# Altium PCB ETL_RB.PcbDoc (part 1 of 3)
Units mm, origin at the board's own origin, x right, y up, seen from the top; angles counter-clockwise.
Board outline 130.3 x 56.5 mm, 8 copper layers (Top Layer, plane 1, M1, plane 2, plane 3, M2, plane 4, Bottom Layer), stack 0.937 mm thick; 226 components, 231 nets, 2035 pads, 85 vias.
Unrouted connection lines stored in the file: 487.
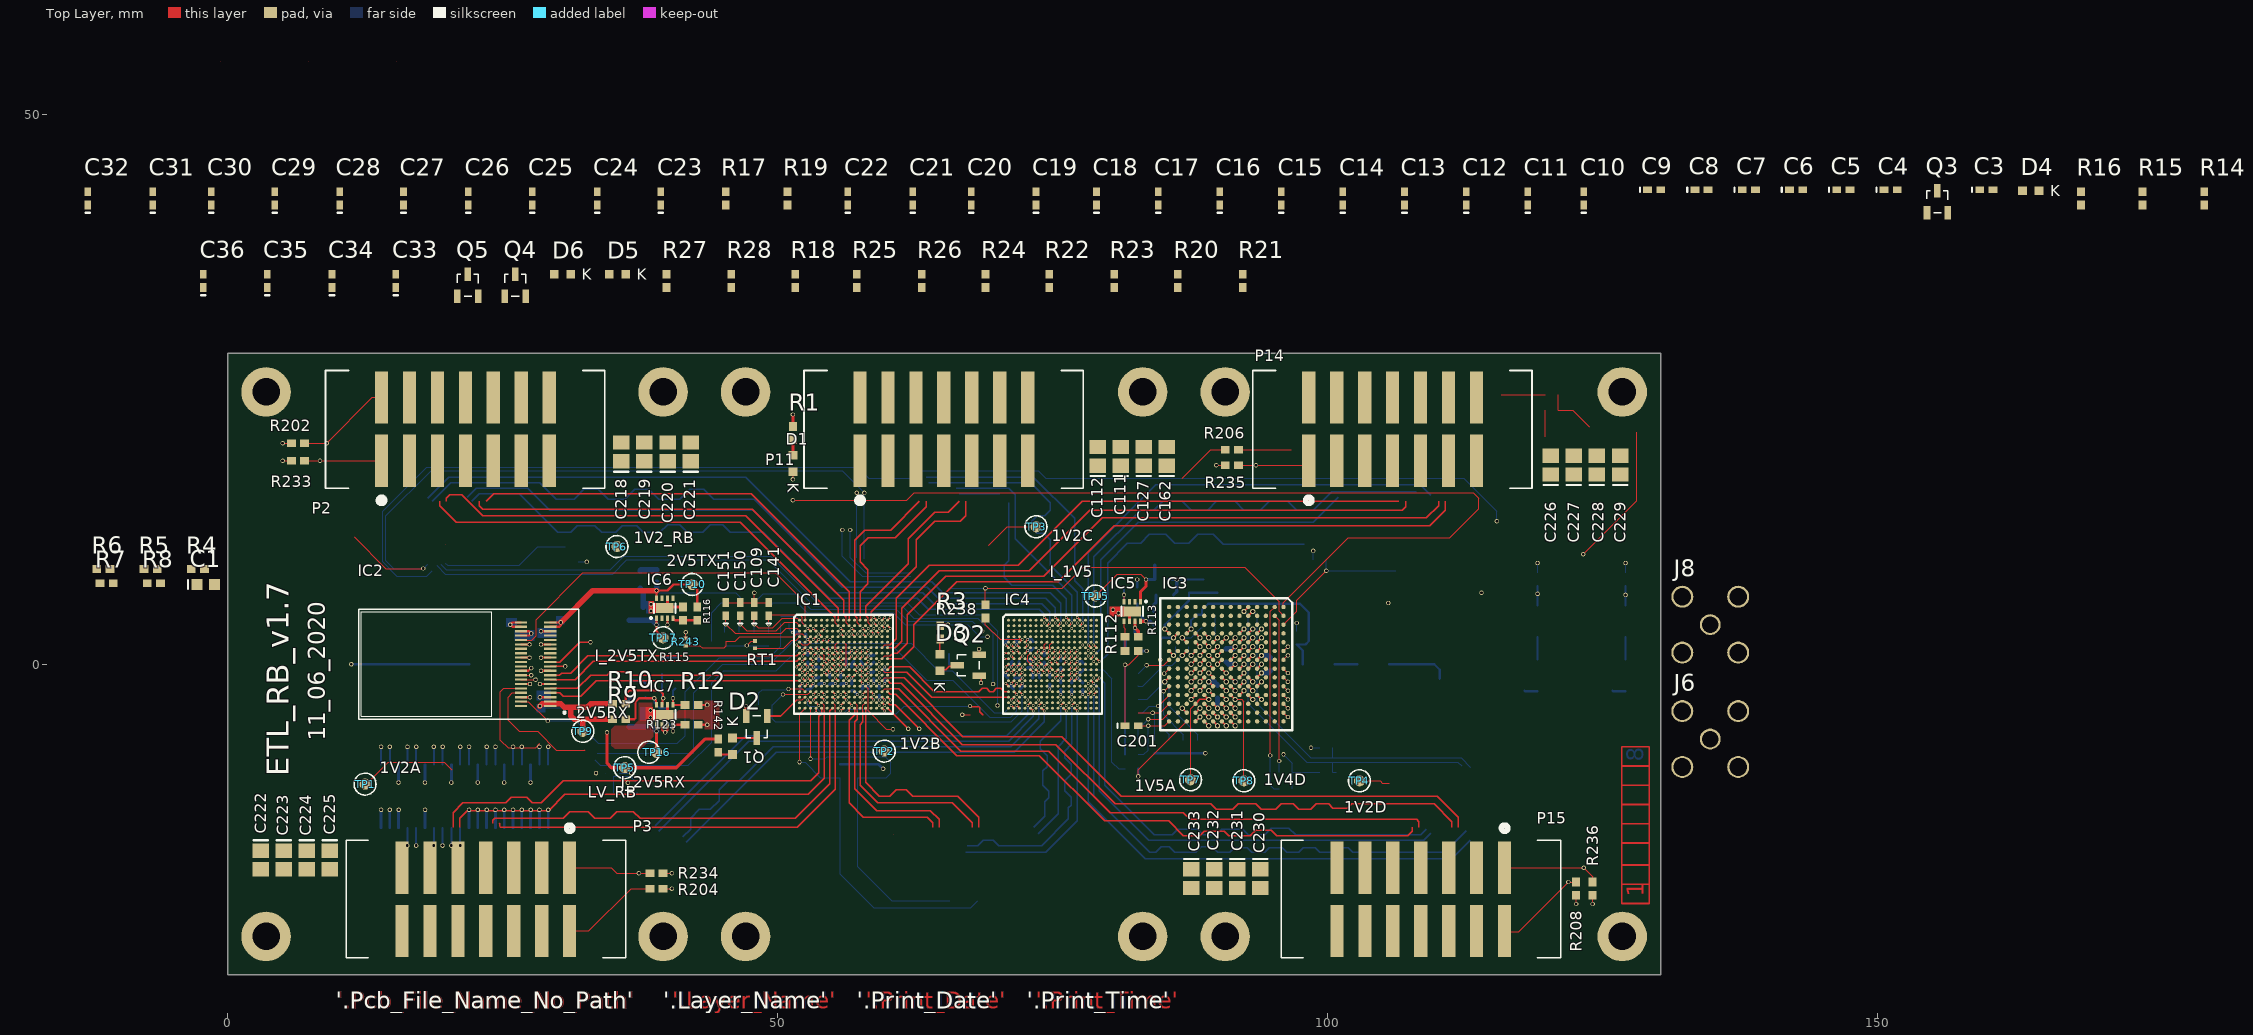
[diagram p0: Top Layer view]
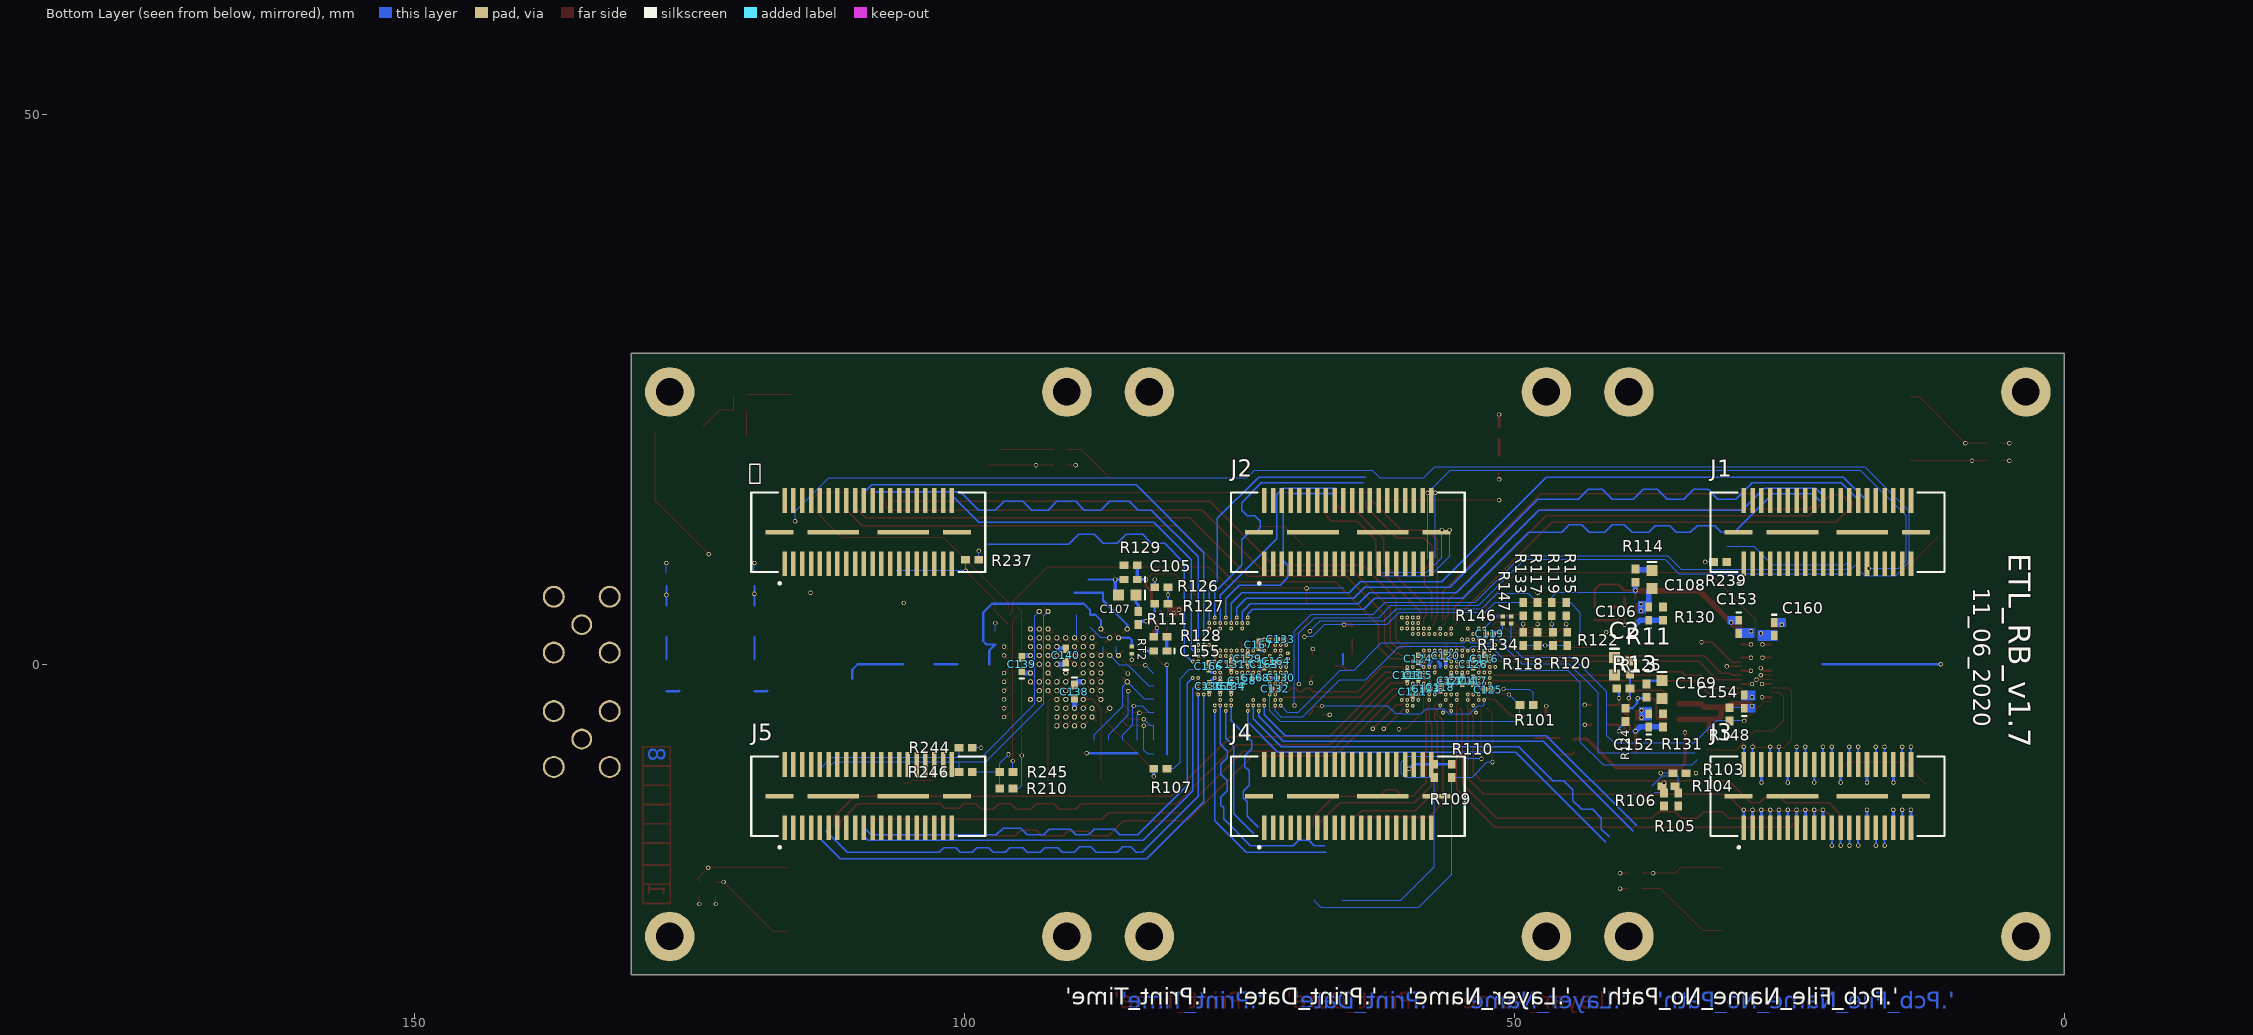
[diagram p1: Bottom Layer view, seen from below]
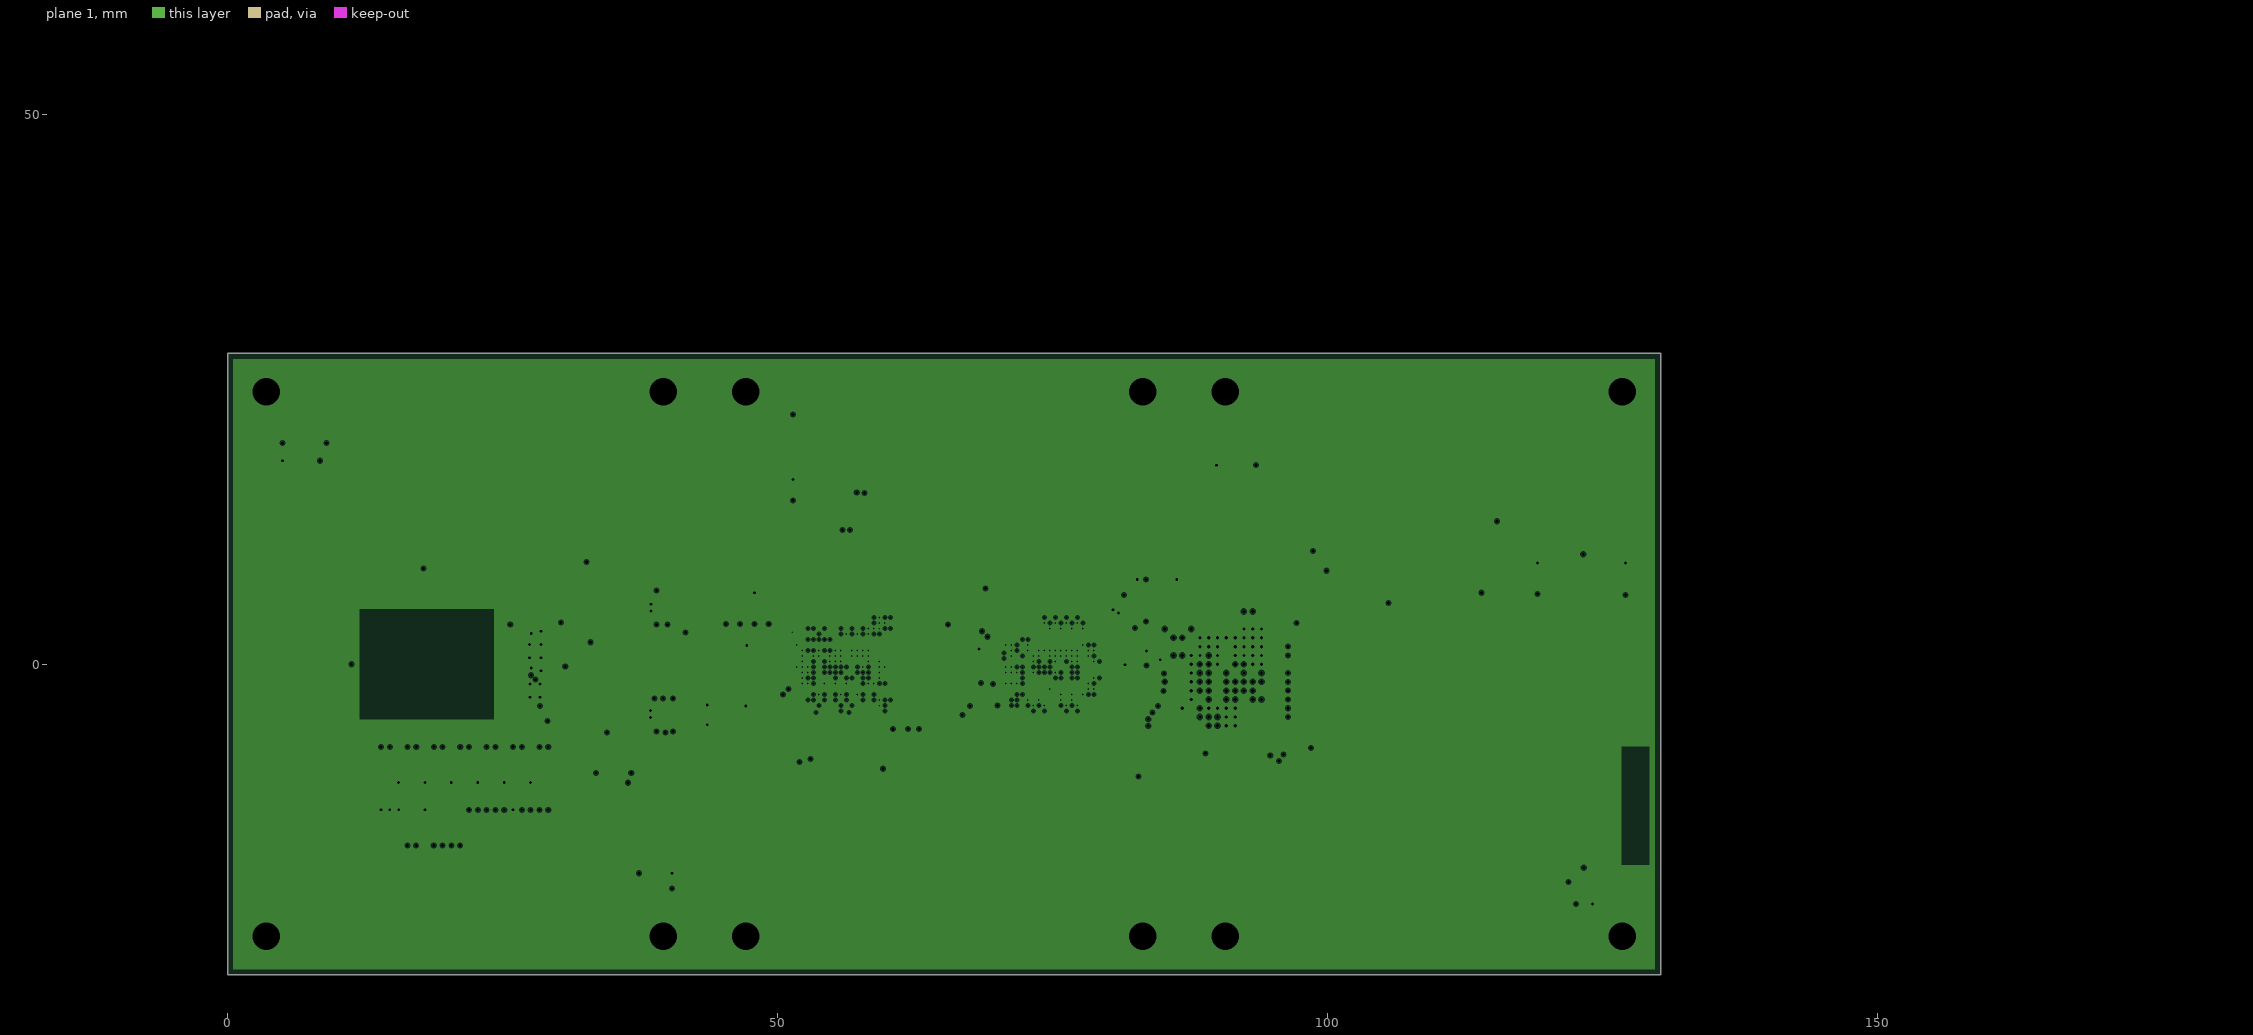
[diagram p2: plane 1, clearances drawn from the general rule]
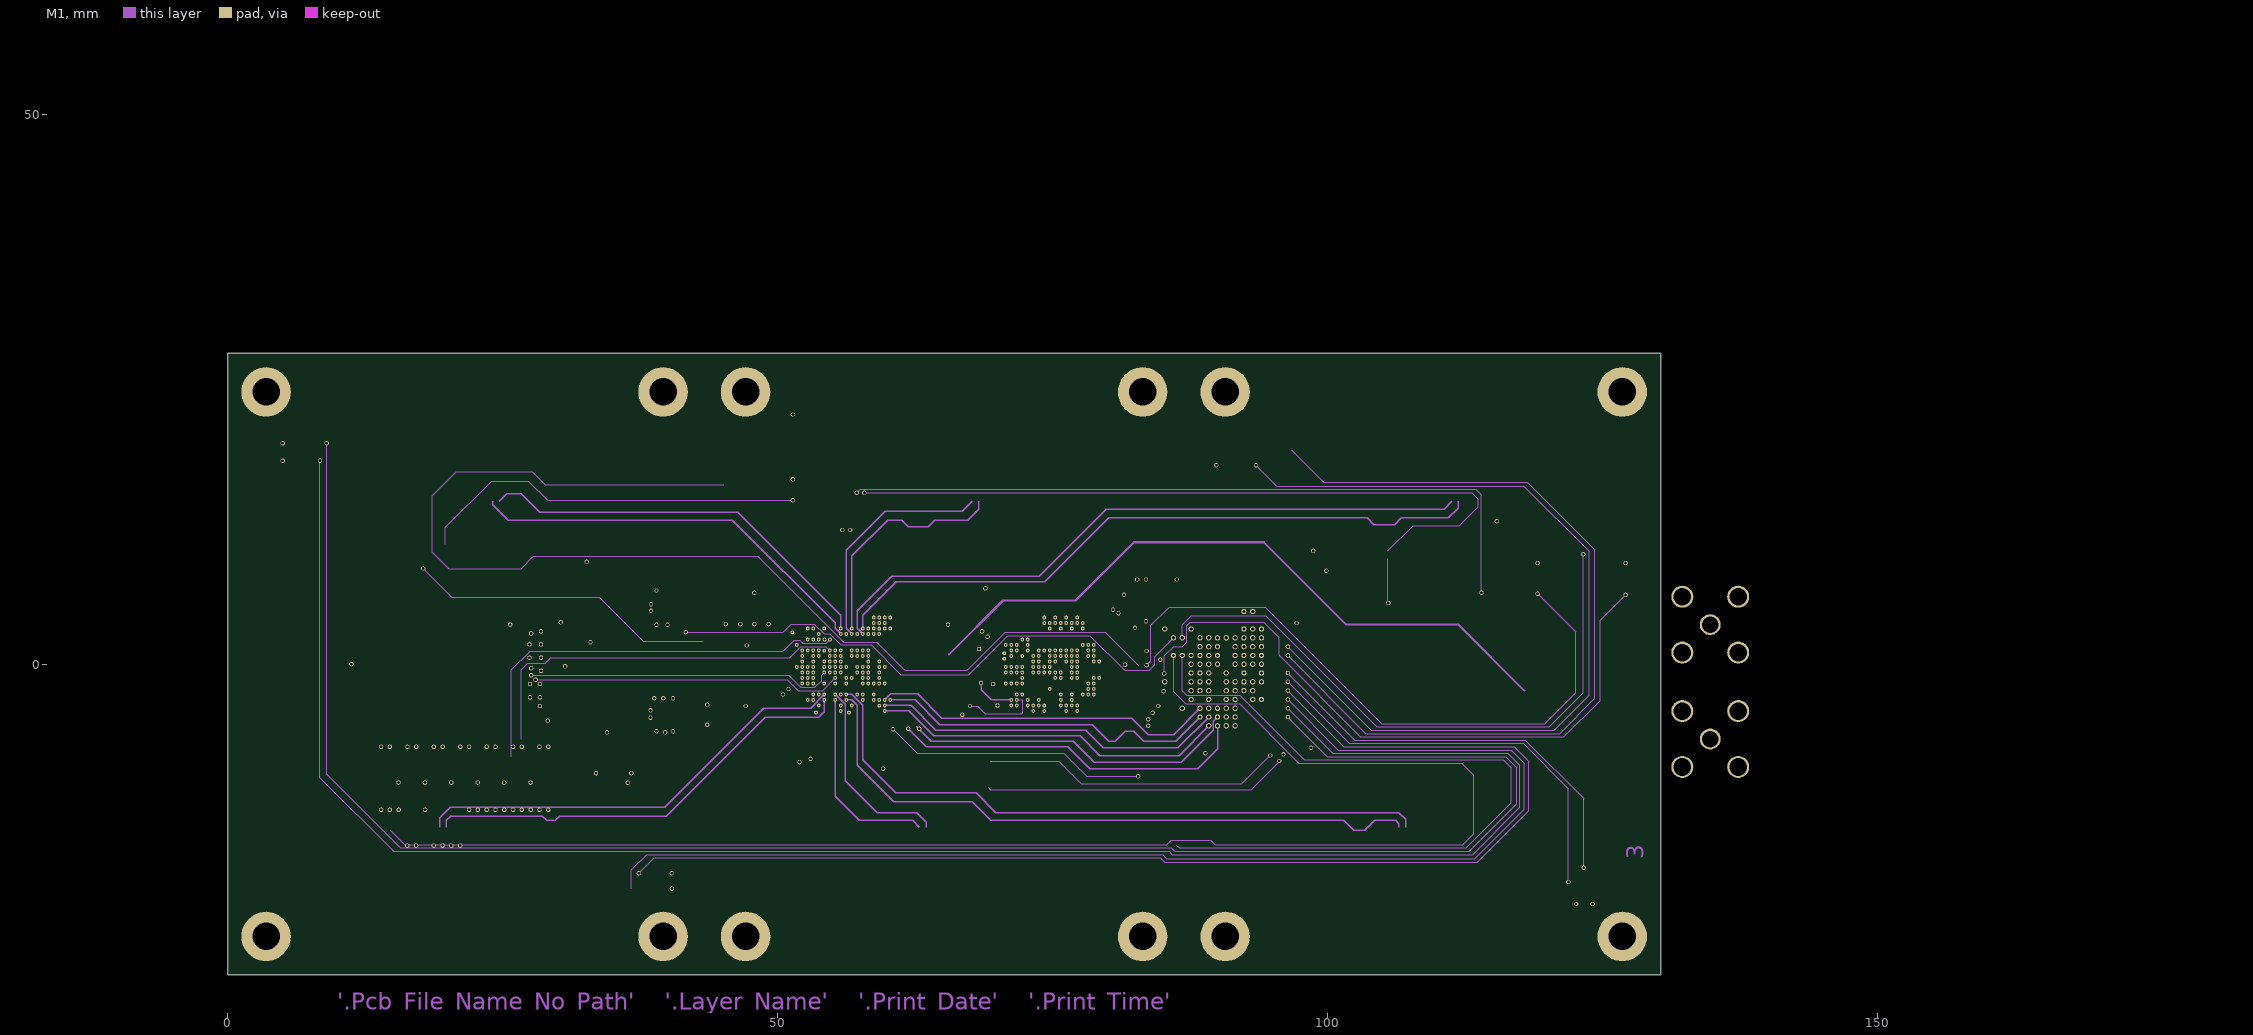
[diagram p3: M1]
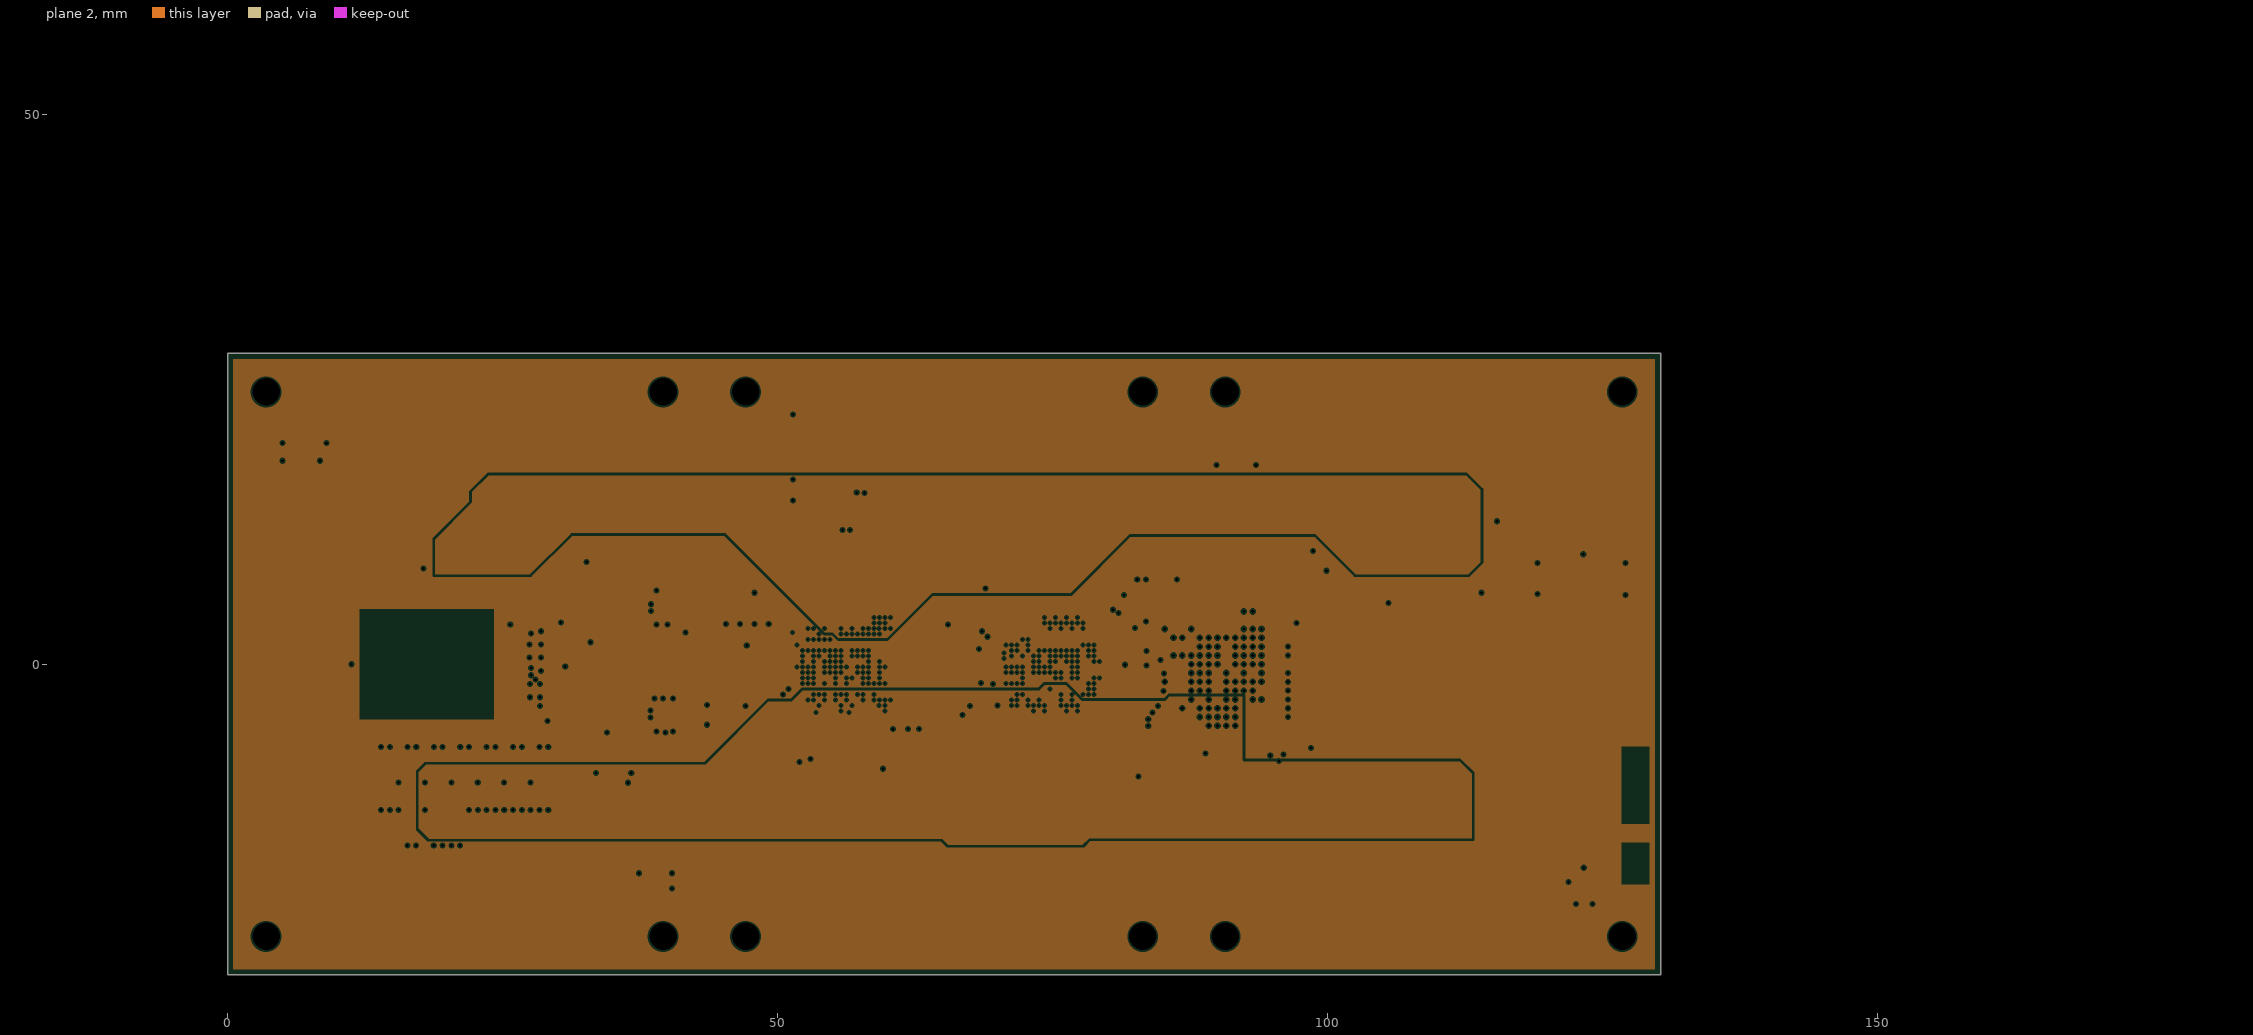
[diagram p4: plane 2, clearances drawn from the general rule]
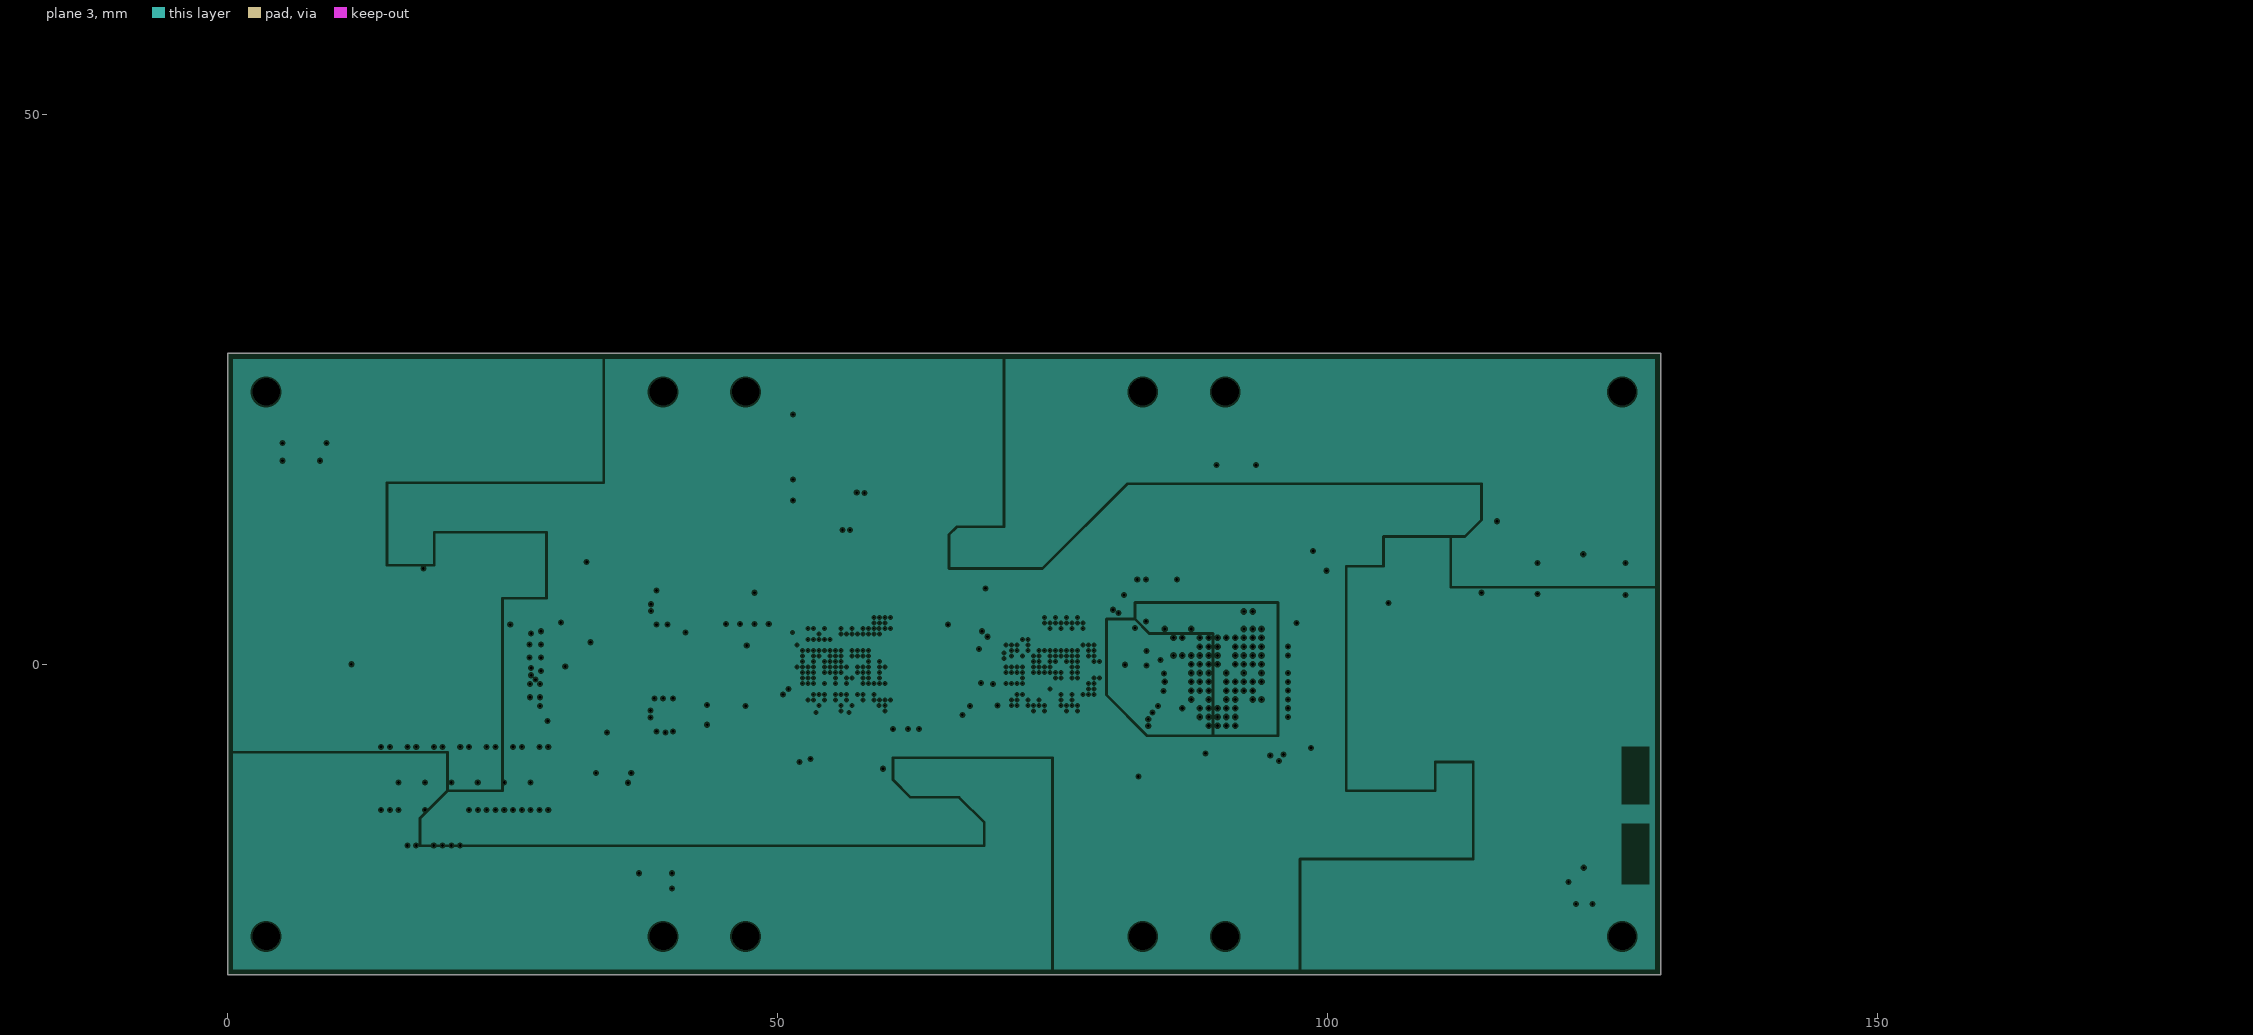
[diagram p5: plane 3, clearances drawn from the general rule]
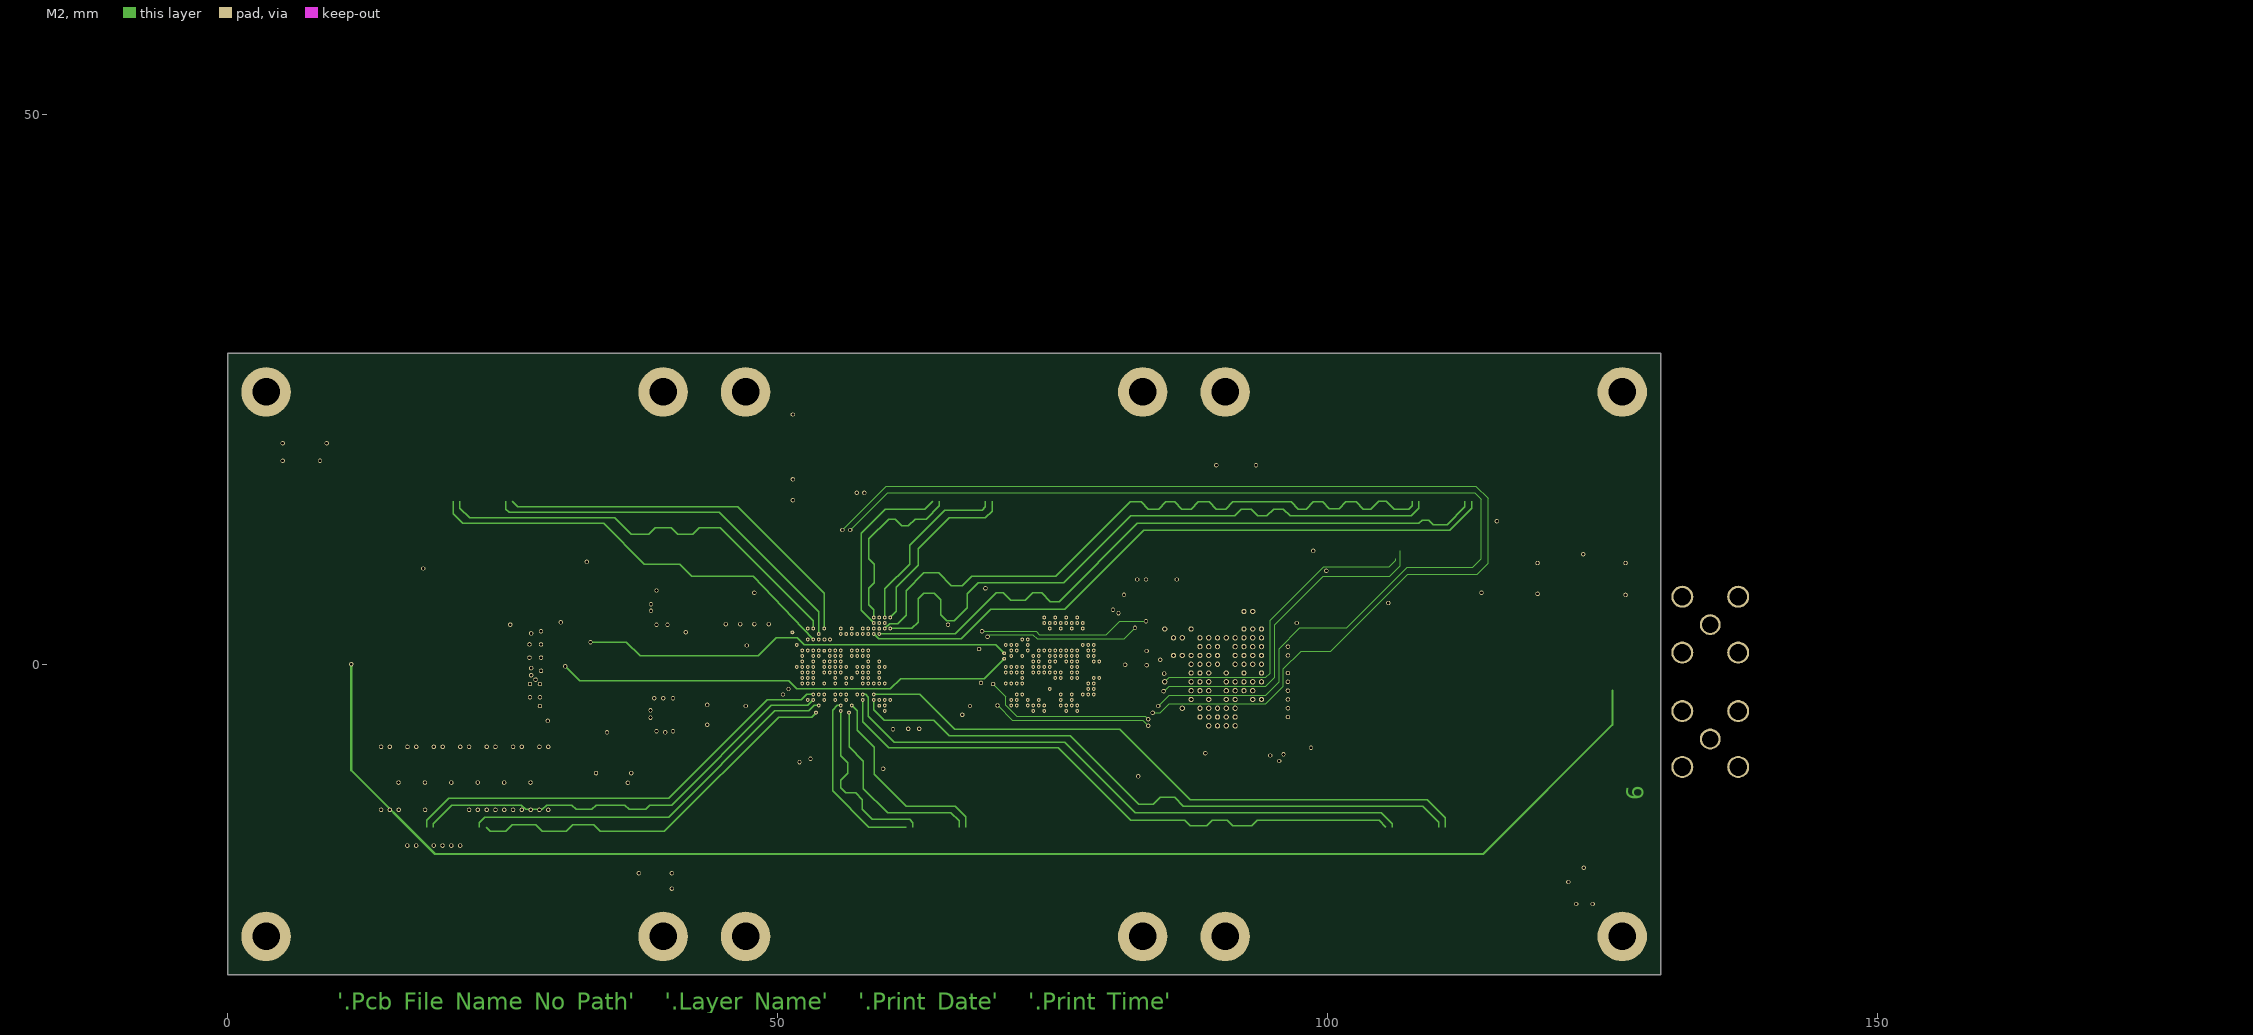
[diagram p6: M2]
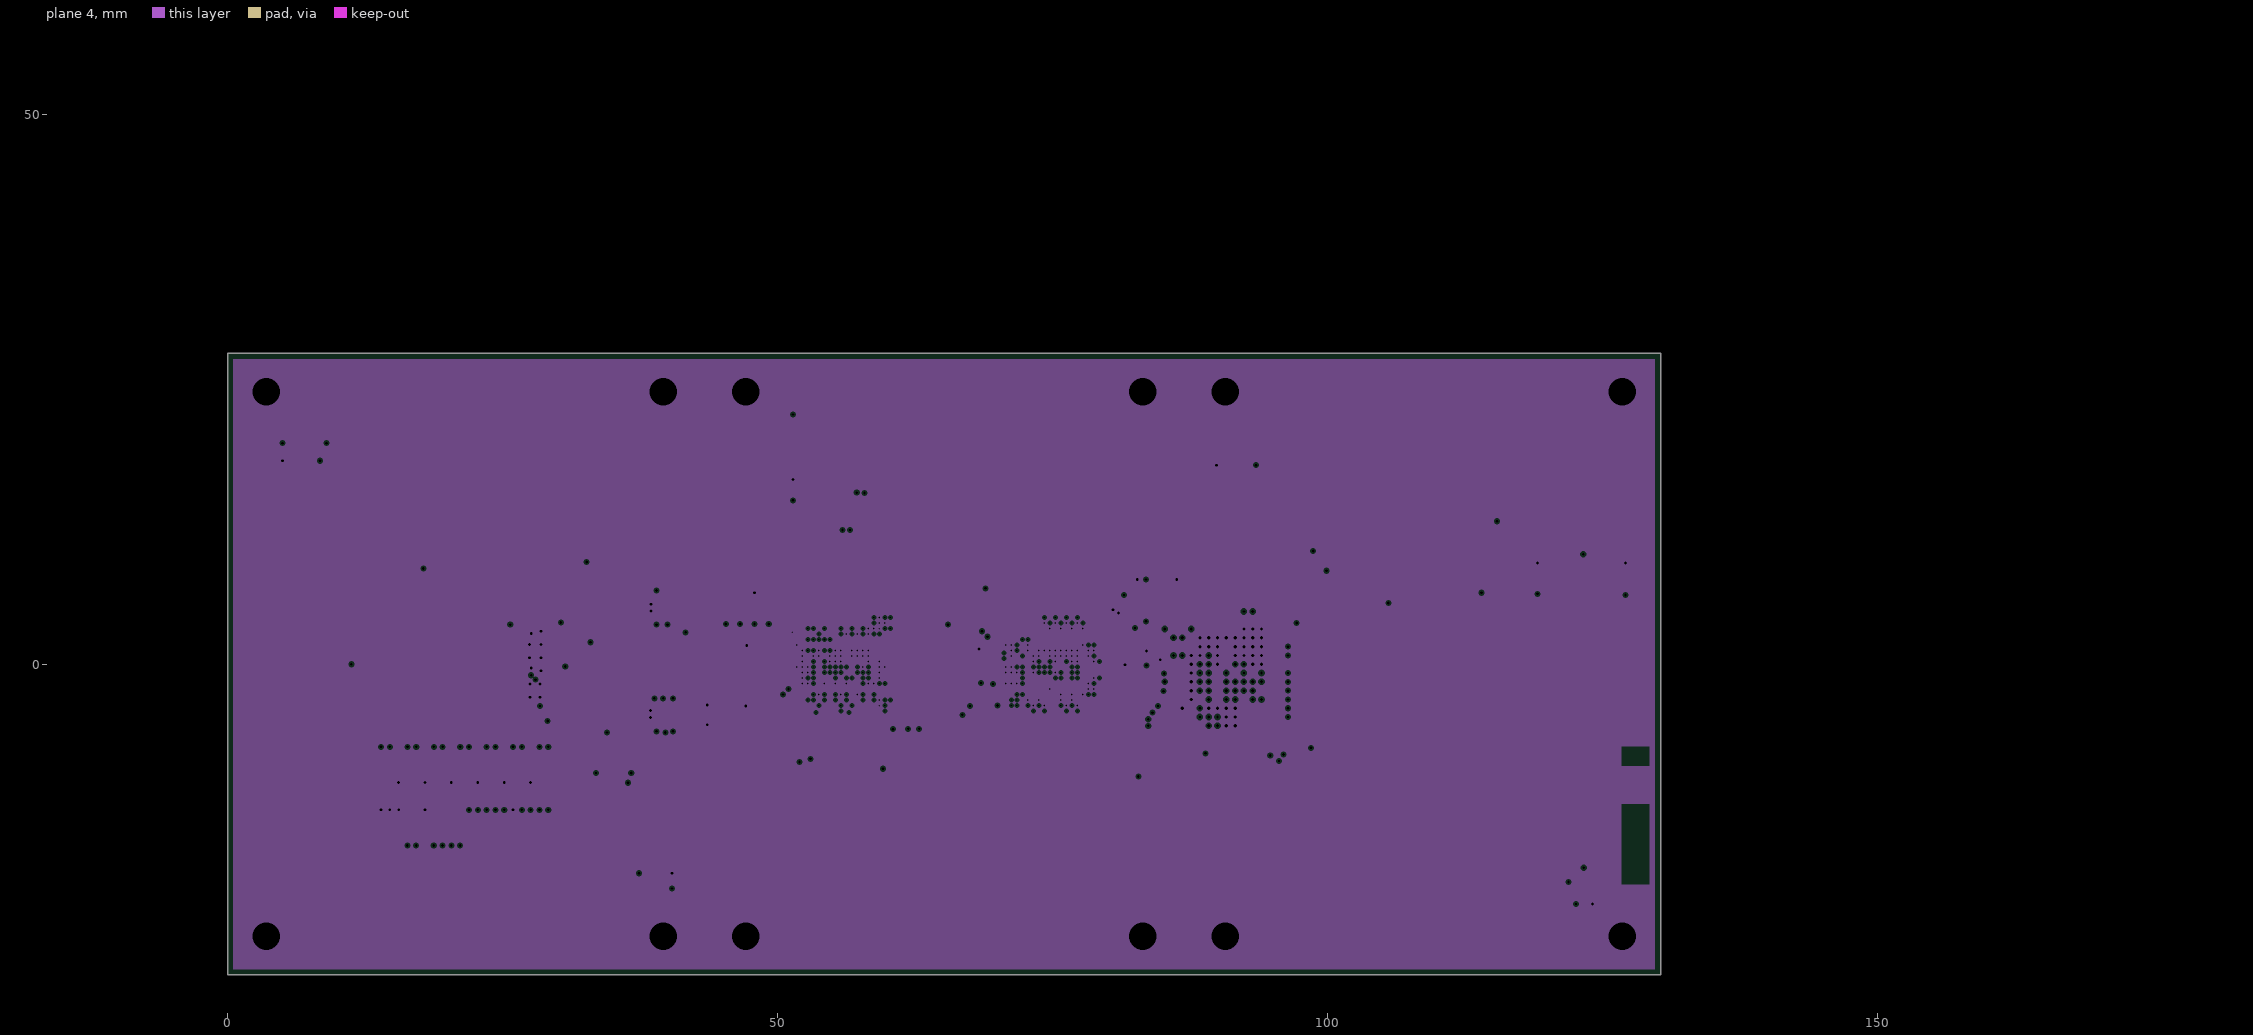
[diagram p7: plane 4, clearances drawn from the general rule]

## Layer stack, top to bottom
Top Solder: solder mask 0.0178, Solder Resist, Dk 4.1
Top Layer: signal copper 0.0175
Dielectric 1: prepreg 0.0691, 1080, Dk 3.4
plane 1: plane copper 0.035, net GND
Dielectric 2: core 0.1016, TU-863, Dk 3.7
M1: signal copper 0.018
Dielectric 3: prepreg 0.1417, 1080, Dk 3.4
plane 2: plane copper 0.035
Dielectric 4: core 0.1016, TU-863, Dk 3.7
plane 3: plane copper 0.035
Dielectric 5: prepreg 0.1417, 1080, Dk 3.4
M2: signal copper 0.018
Dielectric 6: core 0.1016, TU-863, Dk 3.7
plane 4: plane copper 0.035, net GND
Dielectric 7: prepreg 0.0691, 1080, Dk 3.4
Bottom Layer: signal copper 0.0175
Bottom Solder: solder mask 0.0178, Solder Resist, Dk 4.1

## Board outline
0,-28.25 130.3,-28.25 130.3,28.25 0,28.25

## Design rules (kind name [scope] priority, off if disabled: settings)
Clearance [All] p1: gap=0.076 ignorepadtopadclearanceinfootprint=FALSE except(0: Arc-Hole Track-Hole SMDPad-Hole THPad-Hole Via-Hole Fill-Hole Poly-Hole Region-Hole Text-Hole)
Height [All] p1 off: minheight=0 maxheight=25.4 prefheight=12.7
HoleToHoleClearance HoleToHoleClearance_1 [InNet('GND') or InNet('LV_RB') or InNet('1V5A') or InNet('1V5D') or InNet('1V2A') or InNet('1V2B') or InNet('1V2C') or InNet('1V2D') vs InNet('GND') or InNet('LV_RB') or InNet('1V5A') or InNet('1V5D') or InNet('1V2A') or InNet('1V2B') or InNet('1V2C') or InNet('1V2D')] p1: gap=0.15 allowstackedmicrovias=TRUE
HoleToHoleClearance [All] p2: gap=0.254 allowstackedmicrovias=TRUE
MinimumSolderMaskSliver [All] p1: minsoldermaskwidth=0.102
PlaneClearance PlaneClearance_1 [InNetClass('BV')] p1: clearance=0.508
PlaneClearance [All] p2: clearance=0.152
PlaneConnect PlaneConnect_1 [All] p1: planeconnectstyle=Direct reliefexpansion=0.508 reliefentries=4 reliefconductorwidth=0.254 reliefairgap=0.254
PolygonConnect [All] p1: connectstyle=Direct reliefconductorwidth=0.254 reliefentries=4 polygonreliefangle="90 Angle" airgapwidth=0.254
RoutingVias [All] p1: holewidth=0.25 width=0.4 viastyle="Through Hole" minholewidth=0.15 minwidth=0.25 maxholewidth=0.711 maxwidth=1.27
SilkToSilkClearance [All] p1: silktosilkclearance=0.025
SilkToSolderMaskClearance [IsPad] p1: minsilkscreentomaskgap=0.025 clearancetoexposedcopper=TRUE
SolderMaskExpansion SolderMaskExpansion_1 [InPadClass('WP7B40PAD')] p1: expansion=0.038 istentingtop=FALSE
SolderMaskExpansion [All] p2: expansion=0.051 istentingtop=FALSE
Width Width_HS [InNetClass('HS')] p1: maxlimit=0.13 minlimit=0.076 preferedwidth=0.12 midlayer1_minwidth=0.12 midlayer1_maxwidth=0.12 midlayer2_minwidth=0.12 midlayer2_maxwidth=0.12 bottomlayer_minwidth=0.12 bottomlayer_maxwidth=0.12 minimp=50.000000 maximp=50.000000 favimp=50.000000 // impedance controlled signals
Width [All] p2: maxlimit=2.54 minlimit=0.076 preferedwidth=0.12 toplayer_minwidth=0.076 midlayer1_minwidth=0.076 minimp=50.000000 maximp=50.000000 favimp=50.000000
23 further rules are at their usual default settings.

## Classes and differential pairs
component class WP7B:  C3 C4 C5 C6 C7 C8 C9 C10 C11 C12 C13 C14 C15 C16 C17 C18 C19 C20 C21 C22 C23 C24 C25 C26 C27 C28 C29 C30 C31 C32 C201 D4 J1 J2 J3 J4 J5 J6 J8 Q3 R14 R15 R16 R17 R19 R210 R237 R238 R239 R243 R244 R245 R246 RT2 TP1 TP2 TP3 TP4 TP5 TP6 TP7 TP8 TP9 TP10
component class Power: C111 C112 C113 C114 C115 C116 C117 C118 C119 C120 C121 C122 C123 C124 C125 C126 C127 C128 C129 C130 C131 C132 C133 C134 C135 C138 C139 C140 C160 C162 C163 C164 C165 C166 C167 C168 P11
component class lpGBT: C33 C34 C35 C36 C109 C141 C150 C151 D1 D2 D3 D5 D6 IC1 IC2 IC3 IC4 Q1 Q2 Q4 Q5 R1 R3 R18 R20 R21 R22 R23 R24 R25 R26 R27 R28 R101 R103 R104 R105 R106 R107 R109 R110 R117 R118 R119 R120 R122 R133 R134 R135 R142 R146 R147 R148 RT1
pad class WP7B40PAD: IC2-1 IC2-2 IC2-3 IC2-4 IC2-5 IC2-6 IC2-7 IC2-8 IC2-9 IC2-10 IC2-11 IC2-12 IC2-13 IC2-14 IC2-15 IC2-16 IC2-17 IC2-18 IC2-19 IC2-20 IC2-21 IC2-22 IC2-23 IC2-24 IC2-25 IC2-26 IC2-27 IC2-28 IC2-29 IC2-30 IC2-31 IC2-32 IC2-33 IC2-34 IC2-35 IC2-36 IC2-37 IC2-38 IC2-39 IC2-40 IC5-1 IC5-2 IC5-3 IC5-4 IC5-5 IC5-6 IC5-7 IC5-8 IC5-9 IC6-1 IC6-2 IC6-3 IC6-4 IC6-5 IC6-6 IC6-7 IC6-8 IC6-9 IC7-1 IC7-2 IC7-3 IC7-4 IC7-5 IC7-6 IC7-7 IC7-8 IC7-9
component class ETROC_Power: C218 C219 C220 C222 C223 C224 C226 C227 C228 C229 C230 C231 C232 C233 P2 P3 P14 P15 R202 R204 R206 R208 R233 R234 R235 R236
component class LINPOL12: C1 C2 C105 C106 C107 C108 C152 C153 C154 C155 C169 IC5 IC6 IC7 R4 R5 R6 R7 R8 R9 R10 R11 R12 R13 R111 R112 R113 R114 R115 R116 R123 R124 R125 R126 R127 R128 R129 R130 R131 TP15 TP16 TP17

## Components (designator, comment, footprint, x,y, rotation, side; value= is the part's Value field where it differs from the comment)
 "QSE-020-01-XXX-D" SAMTEC_QSE-020-01-XXX-D 108.75,12 r180 bottom
C1 "GRM185R60J106ME15J" CAPC1608N -2,7.25 r0 top value=10uF
C2 "GRM185R60J106ME15J" CAPC1608N 40.9,-0.2 r270 bottom locked value=10uF
C3 "GRM155R71E104ME14D" capc1005n 159.899,43.15 r0 top value=0.1uF
C4 "GRM155R71E104ME14D" capc1005n 151.199,43.15 r0 top value=0.1uF
C5 "GRM155R71E104ME14D" capc1005n 146.899,43.15 r0 top value=0.1uF
C6 "GRM155R71E104ME14D" capc1005n 142.599,43.15 r0 top value=0.1uF
C7 "GRM155R71E104ME14D" capc1005n 138.299,43.15 r0 top value=0.1uF
C8 "GRM155R71E104ME14D" capc1005n 133.999,43.15 r0 top value=0.1uF
C9 "GRM155R71E104ME14D" capc1005n 129.699,43.15 r0 top value=0.1uF
C10 "GRM155R71E104ME14D" capc1005n 123.299,42.35 r90 top value=0.1uF
C11 "GRM155R71E104ME14D" capc1005n 118.199,42.35 r90 top value=0.1uF
C12 "GRM155R71E104ME14D" capc1005n 112.599,42.35 r90 top value=0.1uF
C13 "GRM155R71E104ME14D" capc1005n 106.999,42.35 r90 top value=0.1uF
C14 "GRM155R71E104ME14D" capc1005n 101.399,42.35 r90 top value=0.1uF
C15 "GRM155R71E104ME14D" capc1005n 95.799,42.35 r90 top value=0.1uF
C16 "GRM155R71E104ME14D" capc1005n 90.199,42.35 r90 top value=0.1uF
C17 "GRM155R71E104ME14D" capc1005n 84.599,42.35 r90 top value=0.1uF
C18 "GRM155R71E104ME14D" capc1005n 78.999,42.35 r90 top value=0.1uF
C19 "GRM155R71E104ME14D" capc1005n 73.5,42.35 r90 top value=0.1uF
C20 "GRM155R71E104ME14D" capc1005n 67.6,42.35 r90 top value=0.1uF
C21 "GRM155R71E104ME14D" capc1005n 62.3,42.35 r90 top value=0.1uF
C22 "GRM155R71E104ME14D" capc1005n 56.4,42.35 r90 top value=0.1uF
C23 "GRM155R71E104ME14D" capc1005n 39.4,42.35 r90 top value=0.1uF
C24 "GRM155R71E104ME14D" capc1005n 33.6,42.35 r90 top value=0.1uF
C25 "GRM155R71E104ME14D" capc1005n 27.7,42.35 r90 top value=0.1uF
C26 "GRM155R71E104ME14D" capc1005n 21.9,42.35 r90 top value=0.1uF
C27 "GRM155R71E104ME14D" capc1005n 16,42.35 r90 top value=0.1uF
C28 "GRM155R71E104ME14D" capc1005n 10.2,42.35 r90 top value=0.1uF
C29 "GRM155R71E104ME14D" capc1005n 4.3,42.35 r90 top value=0.1uF
C30 "GRM155R71E104ME14D" capc1005n -1.5,42.35 r90 top value=0.1uF
C31 "GRM155R71E104ME14D" capc1005n -6.8,42.35 r90 top value=0.1uF
C32 "GRM155R71E104ME14D" capc1005n -12.7,42.35 r90 top value=0.1uF
C33 "GRM155R71E104ME14D" capc1005n 15.3,34.85 r90 top value=0.1uF
C34 "GRM155R71E104ME14D" capc1005n 9.5,34.85 r90 top value=0.1uF
C35 "GRM155R71E104ME14D" capc1005n 3.6,34.85 r90 top value=0.1uF
C36 "GRM155R71E104ME14D" capc1005n -2.2,34.85 r90 top value=0.1uF
C105 "GRM155R71E104ME14D" capc1005n 84.9,7.7 r0 bottom locked value=0.1uF
C106 "GRM155R71E104ME14D" capc1005n 37.8,4.6 r90 bottom locked value=0.1uF
C107 "GRM185R60J106ME15J" CAPC1608N 85.2,6.3 r0 bottom locked value=10uF
C108 "GRM185R60J106ME15J" CAPC1608N 37.5,7.7 r270 bottom locked value=10uF
C109 "GRM155R71E104ME14D" capc1005n 47.9,5 r90 top locked value=0.1uF
C111 "GRM188R60J476ME15D" capc2012n 81.2,18.9 r90 top value=47uF
C112 "GRM188R60J476ME15D" capc2012n 79.1,18.9 r90 top value=47uF
C113 "GRM033R61C104KE84D" CAPC0603N 59.75,-1 r90 bottom locked value=0.1uF
C114 "GRM033R61C104KE84D" CAPC0603N 54.75,-1.5 r270 bottom locked value=0.1uF
C115 "GRM033R61C104KE84D" CAPC0603N 58.75,-1 r270 bottom locked value=0.1uF
C116 "GRM033R61C104KE84D" CAPC0603N 52.75,0.5 r270 bottom locked value=0.1uF
C117 "GRM033R61C104KE84D" CAPC0603N 53.75,-1.5 r270 bottom locked value=0.1uF
C118 "GRM033R61C104KE84D" CAPC0603N 56.75,-2.1 r270 bottom locked value=0.1uF
C119 "GRM033R61C104KE84D" CAPC0603N 52.25,2.75 r180 bottom locked value=0.1uF
C120 "GRM033R61C104KE84D" CAPC0603N 56.25,0.75 r90 bottom locked value=0.1uF
C121 "GRM033R61C104KE84D" CAPC0603N 59.25,-2.5 r270 bottom locked value=0.1uF
C122 "GRM033R61C153KE84D" CAPC0603N 55.75,-1.5 r270 bottom locked value=15nF
C123 "GRM033R61C153KE84D" CAPC0603N 58,-2.25 r0 bottom locked value=15nF
C124 "GRM033R61C153KE84D" CAPC0603N 58.75,0.5 r90 bottom locked value=15nF
C125 "GRM033R61C153KE84D" CAPC0603N 52.4,-2.3 r180 bottom locked value=15nF
C126 "GRM033R61C153KE84D" CAPC0603N 53.75,0 r90 bottom locked value=15nF
C127 "GRM188R60J476ME15D" capc2012n 83.3,18.9 r90 top value=47uF
C128 "GRM033R61C104KE84D" CAPC0603N 74.75,-1.5 r270 bottom locked value=0.1uF
C129 "GRM033R61C104KE84D" CAPC0603N 74.25,0.5 r90 bottom locked value=0.1uF
C130 "GRM033R61C104KE84D" CAPC0603N 71.25,-1.25 r180 bottom locked value=0.1uF
C131 "GRM033R61C104KE84D" CAPC0603N 75.75,0 r90 bottom locked value=0.1uF
C132 "GRM033R61C104KE84D" CAPC0603N 71.75,-2.25 r180 bottom locked value=0.1uF
C133 "GRM033R61C104KE84D" CAPC0603N 71.25,2.25 r180 bottom locked value=0.1uF
C134 "GRM033R61C104KE84D" CAPC0603N 75.75,-2 r270 bottom locked value=0.1uF
C135 "GRM033R61C104KE84D" CAPC0603N 77.75,-2 r270 bottom locked value=0.1uF
C138 "GRM155R71E104ME14D" capc1005n 90,-2.5 r270 bottom locked value=0.1uF
C139 "GRM155R71E104ME14D" capc1005n 94.8,0 r90 bottom value=0.1uF
C140 "GRM155R71E104ME14D" capc1005n 90.8,0.8 r90 bottom locked value=0.1uF
C141 "GRM155R71E104ME14D" capc1005n 49.2,5 r90 top locked value=0.1uF
C150 "GRM155R71E104ME14D" capc1005n 46.6,5 r90 top locked value=0.1uF
C151 "GRM155R71E104ME14D" capc1005n 45.3,5 r90 top locked value=0.1uF
C152 "GRM155R71E104ME14D" capc1005n 37.8,-5.1 r90 bottom locked value=0.1uF
C153 "GRM155R71E104ME14D" capc1005n 29.6,3.4 r270 bottom value=0.1uF
C154 "GRM155R71E104ME14D" capc1005n 29.1,-3.4 r90 bottom locked value=0.1uF
C155 "GRM153R60J475ME15D" capc1005n 82.2,1.2 r0 bottom locked value=4.7uF
C160 "GRM155R71E104ME14D" CAPC1005N 26.4,3.2 r270 bottom locked value=0.1uF
C162 "GRM188R60J476ME15D" capc2012n 85.4,18.9 r90 top value=47uF
C163 "GRM033R61C104KE84D" CAPC0603N 72.75,0 r90 bottom locked value=0.1uF
C164 "GRM033R61C153KE84D" CAPC0603N 71.65,0.25 r180 bottom locked value=15nF
C165 "GRM033R61C153KE84D" CAPC0603N 76.75,-2 r270 bottom locked value=15nF
C166 "GRM033R61C153KE84D" CAPC0603N 77.8,-0.2 r90 bottom locked value=15nF
C167 "GRM033R61C153KE84D" CAPC0603N 73.25,1.75 r270 bottom locked value=15nF
C168 "GRM033R61C153KE84D" CAPC0603N 73.5,-1.25 r180 bottom locked value=15nF
C169 "GRM185R60J106ME15J" CAPC1608N 36.6,-2.3 r270 bottom locked value=10uF
C201 "GRM155R71E104ME14D" capc1005n 82.2,-5.6 r0 top value=0.1uF
C218 "GRM188R60J476ME15D" capc2012n 35.8,19.3 r90 top value=47uF
C219 "GRM188R60J476ME15D" capc2012n 37.9,19.3 r90 top value=47uF
C220 "GRM188R60J476ME15D" capc2012n 40,19.3 r90 top value=47uF
C221 "GRM188R60J476ME15D" capc2012n 42.1,19.3 r90 top value=47uF
C222 "GRM188R60J476ME15D" capc2012n 3,-17.8 r270 top value=47uF
C223 "GRM188R60J476ME15D" capc2012n 5.1,-17.8 r270 top value=47uF
C224 "GRM188R60J476ME15D" capc2012n 7.2,-17.8 r270 top value=47uF
C225 "GRM188R60J476ME15D" capc2012n 9.3,-17.8 r270 top value=47uF
C226 "GRM188R60J476ME15D" capc2012n 120.3,18.1 r90 top value=47uF
C227 "GRM188R60J476ME15D" capc2012n 122.4,18.1 r90 top value=47uF
C228 "GRM188R60J476ME15D" capc2012n 124.5,18.1 r90 top value=47uF
C229 "GRM188R60J476ME15D" capc2012n 126.6,18.1 r90 top value=47uF
C230 "GRM188R60J476ME15D" capc2012n 93.9,-19.5 r270 top value=47uF
C231 "GRM188R60J476ME15D" capc2012n 91.8,-19.5 r270 top value=47uF
C232 "GRM188R60J476ME15D" capc2012n 89.7,-19.5 r270 top value=47uF
C233 "GRM188R60J476ME15D" capc2012n 87.6,-19.5 r270 top value=47uF
D1 "LTST-C191KGKT" LED_RED 51.417,18.995 r270 top
D2 "LTST-C191KGKT" LED_RED 45.911,-8.2 r90 top locked
D3 "LTST-C191KGKT" LED_RED 64.768,0.9 r270 top
D4 "LTST-C191KGKT" LED_RED 163.199,43.05 r0 top
D5 "LTST-C191KGKT" LED_RED 34.7,35.45 r0 top
D6 "LTST-C191KGKT" LED_RED 29.7,35.45 r0 top
IC1 "LPGBT" BGA289X17#1 52,4 r0 top locked
IC2 "DF40C-40DS-0.4V" VTRX+ 29.33,-3.8 r90 top locked
IC3 "GBT-SCA" BGA196C80P14X14_1200X1200X170 96,5.2 r270 top locked
IC4 "LPGBT" BGA289X17#2 71,4 r0 top locked
IC5 "linPOL12V" WDFNX208 83,5.7 r180 top
IC6 "linPOL12V" WDFNX208 39,4.2 r0 top locked
IC7 "linPOL12V" WDFNX208 39,-5.5 r0 top locked
J1 "QSE-020-01-XXX-D" SAMTEC_QSE-020-01-XXX-D 21.55,12 r180 bottom
J2 "QSE-020-01-XXX-D" SAMTEC_QSE-020-01-XXX-D 65.15,12 r180 bottom
J3 "QSE-020-01-XXX-D" SAMTEC_QSE-020-01-XXX-D 21.55,-12 r180 bottom locked
J4 "QSE-020-01-XXX-D" SAMTEC_QSE-020-01-XXX-D 65.15,-12 r180 bottom
J5 "QSE-020-01-XXX-D" SAMTEC_QSE-020-01-XXX-D 108.75,-12 r180 bottom
J6 "5-1814832-1" SMA-5-1814832-1 134.8,-6.8 r0 top
J8 "5-1814832-1" SMA-5-1814832-1 134.8,3.6 r0 top
P2 "CnC3020-14-0300-00" cnc14 14,18.5 r0 top locked
P3 "CnC3020-14-0300-00" cnc14 31.1,-18.5 r180 top locked
P11 "CnC3020-14-0300-00" cnc14 57.5,18.5 r0 top locked
P14 "CnC3020-14-0300-00" cnc14 98.3,18.5 r0 top locked
P15 "CnC3020-14-0300-00" cnc14 116.1,-18.5 r180 top locked
Q1 "ZXMN2B01FTA" SOT-23 49.068,-4.7 r180 top locked
Q2 "ZXMN2B01FTA" SOT-23 68.35,-1.05 r90 top
Q3 "ZXMN2B01FTA" SOT-23 154.499,41.05 r0 top
Q4 "ZXMN2B01FTA" SOT-23 25.2,33.45 r0 top
Q5 "ZXMN2B01FTA" SOT-23 20.9,33.45 r0 top
R1 "ERJ-2GEJ102X" resc1005n 51.4,21 r270 top
R3 "ERJ-2GEJ102X" resc1005n 64.8,2.905 r270 top
R4 "0R" resc1005n -2.7,8.65 r0 top
R5 "DNP" resc1005n -7,8.65 r0 top
R6 "ERJ-2BQJR30X" resc1005n -11.3,8.65 r0 top
R7 "RR0510P-4870-D" resc1005n -11,7.35 r0 top
R8 "RR0510P-1541-D" resc1005n -6.7,7.35 r0 top
R9 "0R" resc1005n 35.6,-5 r0 top locked
R10 "DNP" resc1005n 35.6,-3.6 r0 top locked
R11 "ERJ-2BQJR30X" resc1005n 39.5,-0.3 r270 bottom locked
R12 "RR0510P-4870-D" resc1005n 42.2,-3.7 r0 top locked
R13 "RR0510P-1541-D" resc1005n 40.1,-2.2 r0 bottom locked
R14 "ERJ-2GEJ392X" resc1005n 179.699,42.35 r90 top
R15 "ERJ-2GEJ392X" resc1005n 174.099,42.35 r90 top
R16 "ERJ-2GEJ102X" resc1005n 168.499,42.35 r90 top
R17 "RR0510P-103-D" resc1005n 45.3,42.35 r90 top
R18 "ERJ-2GEJ102X" resc1005n 51.6,34.85 r90 top
R19 "RR0510P-102-D" resc1005n 50.9,42.35 r90 top
R20 "RR0510P-122-D" resc1005n 86.399,34.85 r90 top
R21 "RR0510P-302-D" resc1005n 92.299,34.85 r90 top
R22 "RR0510P-122-D" resc1005n 74.7,34.85 r90 top
R23 "RR0510P-302-D" resc1005n 80.599,34.85 r90 top
R24 "ERJ-2GEJ102X" resc1005n 68.9,34.85 r90 top
R25 "RR0510P-122-D" resc1005n 57.2,34.85 r90 top
R26 "RR0510P-302-D" resc1005n 63.1,34.85 r90 top
R27 "RR0510P-122-D" resc1005n 39.9,34.85 r90 top
R28 "RR0510P-302-D" resc1005n 45.8,34.85 r90 top
R101 "ERJ-2GEJ392X" resc1005n 48.9,-3.7 r180 bottom
R103 "ERJ-2GEJ392X" resc1005n 35,-9.9 r180 bottom locked
R104 "ERJ-2GEJ392X" resc1005n 36,-11.1 r180 bottom
R105 "ERJ-2GEJ392X" resc1005n 35.1,-12.3 r270 bottom
R106 "ERJ-2GEJ392X" resc1005n 36.4,-12.3 r270 bottom
R107 "ERJ-2GEJ392X" resc1005n 82.2,-9.5 r0 bottom
R109 "ERJ-2GEJ392X" resc1005n 57.3,-9.7 r90 bottom
R110 "ERJ-2GEJ392X" resc1005n 55.7,-9.7 r90 bottom
R111 "ERJ-2BQJR30X" resc1005n 84.2,4.2 r90 bottom locked
R112 "RR0510P-4020-D" resc1005n 82.2,1.2 r0 top
R113 "RR0510P-6040-D" resc1005n 82.2,2.5 r180 top
R114 "ERJ-2BQJR30X" resc1005n 39,8.05 r270 bottom locked
R115 "RR0510P-4870-D" resc1005n 41.4,4.6 r90 top locked
R116 "RR0510P-1541-D" resc1005n 42.7,4.6 r270 top locked
R117 "RR0510P-152-D" resc1005n 47.9,5 r90 bottom locked
R118 "RR0510P-202-D" resc1005n 47.9,2.3 r90 bottom locked
R119 "RR0510P-302-D" resc1005n 46.6,5 r90 bottom locked
R120 "RR0510P-152-D" resc1005n 46.5,2.3 r90 bottom locked
R122 "RR0510P-152-D" resc1005n 45.2,2.3 r90 bottom locked
R123 "RR0510P-4870-D" resc1005n 42.2,-5.5 r0 top locked
R124 "RR0510P-1541-D" resc1005n 39.9,-4.6 r270 bottom locked
R125 "ERJ-2BQJR30X" resc1005n 38,-2.4 r270 bottom locked
R126 "RR0510P-511-D" resc1005n 82.1,7 r0 bottom locked
R127 "RR0510P-681-D" resc1005n 82.1,5.5 r180 bottom locked
R128 "ERJ-2BQJR30X" resc1005n 82.2,2.5 r180 bottom locked
R129 "ERJ-2GEJ5R1X" resc1005n 84.9,9 r180 bottom locked
R130 "ERJ-2GEJ5R1X" resc1005n 36.5,4.6 r270 bottom locked
R131 "ERJ-2GEJ5R1X" resc1005n 36.5,-5.1 r270 bottom locked
R133 "RR0510P-152-D" resc1005n 49.2,5 r90 bottom locked
R134 "RR0510P-202-D" resc1005n 49.2,2.3 r90 bottom locked
R135 "RR0510P-302-D" resc1005n 45.3,5 r90 bottom locked
R142 "ERJ-2GEJ102X" resc1005n 44.6,-7.4 r270 top locked
R146 "ERJ-1GEF4023C" resc0603 51.05,3.7 r90 bottom locked
R147 "ERJ-1GNF1004C" resc0603 50.3,4.35 r270 bottom
R148 "ERJ-2RKF4751X" resc1005n 30.45,-4.55 r90 bottom locked
R202 "ERJ-2GEJ392X" resc1005n 6.4,20.1 r180 top
R204 "ERJ-2GEJ392X" resc1005n 39,-20.4 r0 top
R206 "ERJ-2GEJ392X" resc1005n 91.3,19.5 r180 top
R208 "ERJ-2GEJ392X" resc1005n 122.6,-20.4 r270 top
R210 "ERJ-2GEJ392X" resc1005n 96.2,-9.8 r0 bottom
R233 "ERJ-2GEJ392X" resc1005n 6.4,18.5 r180 top
R234 "ERJ-2GEJ392X" resc1005n 39,-19 r0 top
R235 "ERJ-2GEJ392X" resc1005n 91.3,18.1 r180 top
R236 "ERJ-2GEJ392X" resc1005n 124.1,-20.4 r270 top
R237 "ERJ-2GEJ392X" resc1005n 99.3,9.5 r180 bottom
R238 "ERJ-2GEJ392X" resc1005n 68.9,4.8 r270 top
R239 "ERJ-2GEJ392X" resc1005n 31.3,9.3 r0 bottom
R243 "ERJ-1GNF-1002C" RESC0603 41.65,2.35 r270 top locked
R244 "ERJ-2GEJ392X" resc1005n 99.9,-7.6 r180 bottom
R245 "ERJ-2GEJ392X" resc1005n 96.2,-11.3 r0 bottom
R246 "ERJ-2GEJ392X" resc1005n 99.9,-9.8 r180 bottom
RT1 "NTCG063UH103HTBX" RESC0603 47.95,2.1 r270 top locked
RT2 "NTCG063UH103HTBX" RESC0603 84.8,0.95 r90 bottom locked
TP1 "1V2A" testpoint#1 12.5,-10.9 r180 top
TP2 "1V2B" testpoint#1 59.7,-7.9 r180 top
TP3 "1V2C" testpoint#1 73.5,12.5 r180 top
TP4 "1V2D" testpoint#1 102.9,-10.6 r180 top
TP5 "LV_RB" testpoint#1 36.1,-9.4 r180 top
TP6 "1V2_RB" testpoint#1 35.4,10.7 r180 top
TP7 "1V5A" testpoint#1 87.55,-10.5 r180 top
TP8 "1V4D" testpoint#1 92.4,-10.6 r180 top
TP9 "2V5RX" testpoint#1 32.3,-6.1 r180 top
TP10 "2V5TX" testpoint#1 42.25,7.25 r270 top
TP15 "I_1V5" testpoint#1 78.9,6.2 r270 top
TP16 "I_2V5RX" testpoint#2 38.3,-8 r270 top locked
TP17 "I_2V5TX" testpoint#1 39.6,2.4 r270 top locked

## Footprints (in the part's own frame and the unit in brackets; to place one, negate y for a bottom-side part, rotate by r counter-clockwise, add the part's x,y. Pads: shape width x height; smd on the part's side, far side on the other; paste and mask are expansions set on the pad)
BGA196C80P14X14_1200X1200X170 [mm] "BGA, 0.80mm Pitch, Square; 196 Pin, 14 Columns X 14 Rows, 12.00mm X 12.00mm X 1.70mm H"
  round 0.4 smd: A1(0,0) A2(0.8,0) A3(1.6,0) A4(2.4,0) A5(3.2,0) A6(4,0) A7(4.8,0) A8(5.6,0) A9(6.4,0) A10(7.2,0) A11(8,0) A12(8.8,0) A13(9.6,0) A14(10.4,0) B1(0,-0.8) B2(0.8,-0.8) B3(1.6,-0.8) B4(2.4,-0.8) B5(3.2,-0.8) B6(4,-0.8) B7(4.8,-0.8) B8(5.6,-0.8) B9(6.4,-0.8) B10(7.2,-0.8) B11(8,-0.8) B12(8.8,-0.8) B13(9.6,-0.8) B14(10.4,-0.8) C1(0,-1.6) C2(0.8,-1.6) C3(1.6,-1.6) C4(2.4,-1.6) C5(3.2,-1.6) C6(4,-1.6) C7(4.8,-1.6) C8(5.6,-1.6) C9(6.4,-1.6) C10(7.2,-1.6) C11(8,-1.6) C12(8.8,-1.6) C13(9.6,-1.6) C14(10.4,-1.6) D1(0,-2.4) D2(0.8,-2.4) D3(1.6,-2.4) D12(8.8,-2.4) D13(9.6,-2.4) D14(10.4,-2.4) E1(0,-3.2) E2(0.8,-3.2) E3(1.6,-3.2) E12(8.8,-3.2) E13(9.6,-3.2) E14(10.4,-3.2) F1(0,-4) F2(0.8,-4) F3(1.6,-4) F12(8.8,-4) F13(9.6,-4) F14(10.4,-4) G1(0,-4.8) G2(0.8,-4.8) G3(1.6,-4.8) G4(2.4,-4.8) H1(0,-5.6) H2(0.8,-5.6) H3(1.6,-5.6) H4(2.4,-5.6) J1(0,-6.4) J2(0.8,-6.4) J3(1.6,-6.4) J4(2.4,-6.4) J13(9.6,-6.4) J14(10.4,-6.4) K1(0,-7.2) K2(0.8,-7.2) K3(1.6,-7.2) K13(9.6,-7.2) K14(10.4,-7.2) L1(0,-8) L2(0.8,-8) L3(1.6,-8) L13(9.6,-8) L14(10.4,-8) M1(0,-8.8) M2(0.8,-8.8) M3(1.6,-8.8) M4(2.4,-8.8) M5(3.2,-8.8) M6(4,-8.8) M7(4.8,-8.8) M8(5.6,-8.8) M9(6.4,-8.8) M10(7.2,-8.8) M11(8,-8.8) M12(8.8,-8.8) M14(10.4,-8.8) N1(0,-9.6) N2(0.8,-9.6) N3(1.6,-9.6) N4(2.4,-9.6) N5(3.2,-9.6) N6(4,-9.6) N7(4.8,-9.6) N8(5.6,-9.6) N9(6.4,-9.6) N10(7.2,-9.6) N11(8,-9.6) N12(8.8,-9.6) N13(9.6,-9.6) N14(10.4,-9.6) P1(0,-10.4) P2(0.8,-10.4) P3(1.6,-10.4) P4(2.4,-10.4) P5(3.2,-10.4) P6(4,-10.4) P7(4.8,-10.4) P8(5.6,-10.4) P9(6.4,-10.4) P10(7.2,-10.4) P11(8,-10.4) P12(8.8,-10.4) P13(9.6,-10.4) P14(10.4,-10.4)
  round 0.4 smd mask+0.051: D4(2.4,-2.4) D5(3.2,-2.4) D6(4,-2.4) D7(4.8,-2.4) D8(5.6,-2.4) D9(6.4,-2.4) D10(7.2,-2.4) D11(8,-2.4) E4(2.4,-3.2) E5(3.2,-3.2) E6(4,-3.2) E7(4.8,-3.2) E8(5.6,-3.2) E9(6.4,-3.2) E10(7.2,-3.2) E11(8,-3.2) F4(2.4,-4) F5(3.2,-4) F6(4,-4) F7(4.8,-4) F8(5.6,-4) F9(6.4,-4) F10(7.2,-4) F11(8,-4) G5(3.2,-4.8) G6(4,-4.8) G7(4.8,-4.8) G8(5.6,-4.8) G9(6.4,-4.8) G10(7.2,-4.8) G11(8,-4.8) G12(8.8,-4.8) G13(9.6,-4.8) G14(10.4,-4.8) H5(3.2,-5.6) H6(4,-5.6) H7(4.8,-5.6) H8(5.6,-5.6) H9(6.4,-5.6) H10(7.2,-5.6) H11(8,-5.6) H12(8.8,-5.6) H13(9.6,-5.6) H14(10.4,-5.6) J5(3.2,-6.4) J6(4,-6.4) J7(4.8,-6.4) J8(5.6,-6.4) J9(6.4,-6.4) J10(7.2,-6.4) J11(8,-6.4) J12(8.8,-6.4) K4(2.4,-7.2) K5(3.2,-7.2) K6(4,-7.2) K7(4.8,-7.2) K8(5.6,-7.2) K9(6.4,-7.2) K10(7.2,-7.2) K11(8,-7.2) K12(8.8,-7.2) L4(2.4,-8) L5(3.2,-8) L6(4,-8) L7(4.8,-8) L8(5.6,-8) L9(6.4,-8) L10(7.2,-8) L11(8,-8) L12(8.8,-8) M13(9.6,-8.8)
  silkscreen extent -0.8,-11.2 11.2,0.8, body extent -0.8,-11.2 11.2,0.8, height 1.7
BGA289X17#1 [mm]
  round 0.27 smd: A1(0,0) A2(0.5,0) A3(1,0) A4(1.5,0) A5(2,0) A6(2.5,0) A7(3,0) A8(3.5,0) A9(4,0) A10(4.5,0) A11(5,0) A12(5.5,0) A13(6,0) A14(6.5,0) A15(7,0) A16(7.5,0) A17(8,0) B1(0,-0.5) B2(0.5,-0.5) B3(1,-0.5) B4(1.5,-0.5) B5(2,-0.5) B6(2.5,-0.5) B7(3,-0.5) B8(3.5,-0.5) B9(4,-0.5) B10(4.5,-0.5) B11(5,-0.5) B12(5.5,-0.5) B13(6,-0.5) B14(6.5,-0.5) B15(7,-0.5) B16(7.5,-0.5) B17(8,-0.5) C1(0,-1) C2(0.5,-1) C3(1,-1) C4(1.5,-1) C5(2,-1) C6(2.5,-1) C7(3,-1) C8(3.5,-1) C9(4,-1) C10(4.5,-1) C11(5,-1) C12(5.5,-1) C13(6,-1) C14(6.5,-1) C15(7,-1) C16(7.5,-1) C17(8,-1) D1(0,-1.5) D2(0.5,-1.5) D3(1,-1.5) D4(1.5,-1.5) D5(2,-1.5) D6(2.5,-1.5) D7(3,-1.5) D8(3.5,-1.5) D9(4,-1.5) D10(4.5,-1.5) D11(5,-1.5) D12(5.5,-1.5) D13(6,-1.5) D14(6.5,-1.5) D15(7,-1.5) D16(7.5,-1.5) D17(8,-1.5) E1(0,-2) E2(0.5,-2) E3(1,-2) E4(1.5,-2) E5(2,-2) E6(2.5,-2) E7(3,-2) E8(3.5,-2) E9(4,-2) E10(4.5,-2) E11(5,-2) E12(5.5,-2) E13(6,-2) E14(6.5,-2) E15(7,-2) E16(7.5,-2) E17(8,-2) F1(0,-2.5) F2(0.5,-2.5) F3(1,-2.5) F4(1.5,-2.5) F5(2,-2.5) F6(2.5,-2.5) F7(3,-2.5) F8(3.5,-2.5) F9(4,-2.5) F10(4.5,-2.5) F11(5,-2.5) F12(5.5,-2.5) F13(6,-2.5) F14(6.5,-2.5) F15(7,-2.5) F16(7.5,-2.5) F17(8,-2.5) G1(0,-3) G2(0.5,-3) G3(1,-3) G4(1.5,-3) G5(2,-3) G6(2.5,-3) G7(3,-3) G8(3.5,-3) G9(4,-3) G10(4.5,-3) G11(5,-3) G12(5.5,-3) G13(6,-3) G14(6.5,-3) G15(7,-3) G16(7.5,-3) G17(8,-3) H1(0,-3.5) H2(0.5,-3.5) H3(1,-3.5) H4(1.5,-3.5) H5(2,-3.5) H6(2.5,-3.5) H7(3,-3.5) H8(3.5,-3.5) H9(4,-3.5) H10(4.5,-3.5) H11(5,-3.5) H12(5.5,-3.5) H13(6,-3.5) H14(6.5,-3.5) H15(7,-3.5) H16(7.5,-3.5) H17(8,-3.5) J1(0,-4) J2(0.5,-4) J3(1,-4) J4(1.5,-4) J5(2,-4) J6(2.5,-4) J7(3,-4) J8(3.5,-4) J9(4,-4) J10(4.5,-4) J11(5,-4) J12(5.5,-4) J13(6,-4) J14(6.5,-4) J15(7,-4) J16(7.5,-4) J17(8,-4) K1(0,-4.5) K2(0.5,-4.5) K3(1,-4.5) K4(1.5,-4.5) K5(2,-4.5) K6(2.5,-4.5) K7(3,-4.5) K8(3.5,-4.5) K9(4,-4.5) K10(4.5,-4.5) K11(5,-4.5) K12(5.5,-4.5) K13(6,-4.5) K14(6.5,-4.5) K15(7,-4.5) K16(7.5,-4.5) K17(8,-4.5) L1(0,-5) L2(0.5,-5) L3(1,-5) L4(1.5,-5) L5(2,-5) L6(2.5,-5) L7(3,-5) L8(3.5,-5) L9(4,-5) L10(4.5,-5) L11(5,-5) L12(5.5,-5) L13(6,-5) L14(6.5,-5) L15(7,-5) L16(7.5,-5) L17(8,-5) M1(0,-5.5) M2(0.5,-5.5) M3(1,-5.5) M4(1.5,-5.5) M5(2,-5.5) M6(2.5,-5.5) M7(3,-5.5) M8(3.5,-5.5) M9(4,-5.5) M10(4.5,-5.5) M11(5,-5.5) M12(5.5,-5.5) M13(6,-5.5) M14(6.5,-5.5) M15(7,-5.5) M16(7.5,-5.5) M17(8,-5.5) N1(0,-6) N2(0.5,-6) N3(1,-6) N4(1.5,-6) N5(2,-6) N6(2.5,-6) N7(3,-6) N8(3.5,-6) N9(4,-6) N10(4.5,-6) N11(5,-6) N12(5.5,-6) N13(6,-6) N14(6.5,-6) N15(7,-6) N16(7.5,-6) N17(8,-6) P1(0,-6.5) P2(0.5,-6.5) P3(1,-6.5) P4(1.5,-6.5) P5(2,-6.5) P6(2.5,-6.5) P7(3,-6.5) P8(3.5,-6.5) P9(4,-6.5) P10(4.5,-6.5) P11(5,-6.5) P12(5.5,-6.5) P13(6,-6.5) P14(6.5,-6.5) P15(7,-6.5) P16(7.5,-6.5) P17(8,-6.5) R1(0,-7) R2(0.5,-7) R3(1,-7) R4(1.5,-7) R5(2,-7) R6(2.5,-7) R7(3,-7) R8(3.5,-7) R9(4,-7) R10(4.5,-7) R11(5,-7) R12(5.5,-7) R13(6,-7) R14(6.5,-7) R15(7,-7) R16(7.5,-7) R17(8,-7) S(1,-7.5) T1(0,-7.5) T2(0.5,-7.5) T4(1.5,-7.5) T5(2,-7.5) T6(2.5,-7.5) T7(3,-7.5) T8(3.5,-7.5) T9(4,-7.5) T10(4.5,-7.5) T11(5,-7.5) T12(5.5,-7.5) T13(6,-7.5) T14(6.5,-7.5) T15(7,-7.5) T16(7.5,-7.5) T17(8,-7.5) U1(0,-8) U2(0.5,-8) U3(1,-8) U4(1.5,-8) U5(2,-8) U6(2.5,-8) U7(3,-8) U8(3.5,-8) U9(4,-8) U10(4.5,-8) U11(5,-8) U12(5.5,-8) U13(6,-8) U14(6.5,-8) U15(7,-8) U16(7.5,-8) U17(8,-8)
  silkscreen extent -0.5,-8.5 8.5,0.5, body extent -0.5,-8.5 8.5,0.5, height 1.3
BGA289X17#2 [mm]
  round 0.27 smd: A1(0,0) A2(0.5,0) A3(1,0) A4(1.5,0) A5(2,0) A6(2.5,0) A7(3,0) A8(3.5,0) A9(4,0) A10(4.5,0) A11(5,0) A12(5.5,0) A13(6,0) A14(6.5,0) A15(7,0) A16(7.5,0) A17(8,0) B1(0,-0.5) B2(0.5,-0.5) B3(1,-0.5) B4(1.5,-0.5) B5(2,-0.5) B6(2.5,-0.5) B7(3,-0.5) B8(3.5,-0.5) B9(4,-0.5) B10(4.5,-0.5) B11(5,-0.5) B12(5.5,-0.5) B13(6,-0.5) B14(6.5,-0.5) B15(7,-0.5) B16(7.5,-0.5) B17(8,-0.5) C1(0,-1) C2(0.5,-1) C3(1,-1) C4(1.5,-1) C5(2,-1) C6(2.5,-1) C7(3,-1) C8(3.5,-1) C9(4,-1) C10(4.5,-1) C11(5,-1) C12(5.5,-1) C13(6,-1) C14(6.5,-1) C15(7,-1) C16(7.5,-1) C17(8,-1) D1(0,-1.5) D2(0.5,-1.5) D3(1,-1.5) D4(1.5,-1.5) D5(2,-1.5) D6(2.5,-1.5) D7(3,-1.5) D8(3.5,-1.5) D9(4,-1.5) D10(4.5,-1.5) D11(5,-1.5) D12(5.5,-1.5) D13(6,-1.5) D14(6.5,-1.5) D15(7,-1.5) D16(7.5,-1.5) D17(8,-1.5) E1(0,-2) E2(0.5,-2) E3(1,-2) E4(1.5,-2) E5(2,-2) E6(2.5,-2) E7(3,-2) E8(3.5,-2) E9(4,-2) E10(4.5,-2) E11(5,-2) E12(5.5,-2) E13(6,-2) E14(6.5,-2) E15(7,-2) E16(7.5,-2) E17(8,-2) F1(0,-2.5) F2(0.5,-2.5) F3(1,-2.5) F4(1.5,-2.5) F5(2,-2.5) F6(2.5,-2.5) F7(3,-2.5) F8(3.5,-2.5) F9(4,-2.5) F10(4.5,-2.5) F11(5,-2.5) F12(5.5,-2.5) F13(6,-2.5) F14(6.5,-2.5) F15(7,-2.5) F16(7.5,-2.5) F17(8,-2.5) G1(0,-3) G2(0.5,-3) G3(1,-3) G4(1.5,-3) G5(2,-3) G6(2.5,-3) G7(3,-3) G8(3.5,-3) G9(4,-3) G10(4.5,-3) G11(5,-3) G12(5.5,-3) G13(6,-3) G14(6.5,-3) G15(7,-3) G16(7.5,-3) G17(8,-3) H1(0,-3.5) H2(0.5,-3.5) H3(1,-3.5) H4(1.5,-3.5) H5(2,-3.5) H6(2.5,-3.5) H7(3,-3.5) H8(3.5,-3.5) H9(4,-3.5) H10(4.5,-3.5) H11(5,-3.5) H12(5.5,-3.5) H13(6,-3.5) H14(6.5,-3.5) H15(7,-3.5) H16(7.5,-3.5) H17(8,-3.5) J1(0,-4) J2(0.5,-4) J3(1,-4) J4(1.5,-4) J5(2,-4) J6(2.5,-4) J7(3,-4) J8(3.5,-4) J9(4,-4) J10(4.5,-4) J11(5,-4) J12(5.5,-4) J13(6,-4) J14(6.5,-4) J15(7,-4) J16(7.5,-4) J17(8,-4) K1(0,-4.5) K2(0.5,-4.5) K3(1,-4.5) K4(1.5,-4.5) K5(2,-4.5) K6(2.5,-4.5) K7(3,-4.5) K8(3.5,-4.5) K9(4,-4.5) K10(4.5,-4.5) K11(5,-4.5) K12(5.5,-4.5) K13(6,-4.5) K14(6.5,-4.5) K15(7,-4.5) K16(7.5,-4.5) K17(8,-4.5) L1(0,-5) L2(0.5,-5) L3(1,-5) L4(1.5,-5) L5(2,-5) L6(2.5,-5) L7(3,-5) L8(3.5,-5) L9(4,-5) L10(4.5,-5) L11(5,-5) L12(5.5,-5) L13(6,-5) L14(6.5,-5) L15(7,-5) L16(7.5,-5) L17(8,-5) M1(0,-5.5) M2(0.5,-5.5) M3(1,-5.5) M4(1.5,-5.5) M5(2,-5.5) M6(2.5,-5.5) M7(3,-5.5) M8(3.5,-5.5) M9(4,-5.5) M10(4.5,-5.5) M11(5,-5.5) M12(5.5,-5.5) M13(6,-5.5) M14(6.5,-5.5) M15(7,-5.5) M16(7.5,-5.5) M17(8,-5.5) N1(0,-6) N2(0.5,-6) N3(1,-6) N4(1.5,-6) N5(2,-6) N6(2.5,-6) N7(3,-6) N8(3.5,-6) N9(4,-6) N10(4.5,-6) N11(5,-6) N12(5.5,-6) N13(6,-6) N14(6.5,-6) N15(7,-6) N16(7.5,-6) N17(8,-6) P1(0,-6.5) P2(0.5,-6.5) P3(1,-6.5) P4(1.5,-6.5) P5(2,-6.5) P6(2.5,-6.5) P7(3,-6.5) P8(3.5,-6.5) P9(4,-6.5) P10(4.5,-6.5) P11(5,-6.5) P12(5.5,-6.5) P13(6,-6.5) P14(6.5,-6.5) P15(7,-6.5) P16(7.5,-6.5) P17(8,-6.5) R1(0,-7) R2(0.5,-7) R3(1,-7) R4(1.5,-7) R5(2,-7) R6(2.5,-7) R7(3,-7) R8(3.5,-7) R9(4,-7) R10(4.5,-7) R11(5,-7) R12(5.5,-7) R13(6,-7) R14(6.5,-7) R15(7,-7) R16(7.5,-7) R17(8,-7) T1(0,-7.5) T2(0.5,-7.5) T3(1,-7.5) T4(1.5,-7.5) T5(2,-7.5) T6(2.5,-7.5) T7(3,-7.5) T8(3.5,-7.5) T9(4,-7.5) T10(4.5,-7.5) T11(5,-7.5) T12(5.5,-7.5) T13(6,-7.5) T14(6.5,-7.5) T15(7,-7.5) T16(7.5,-7.5) T17(8,-7.5) U1(0,-8) U2(0.5,-8) U3(1,-8) U4(1.5,-8) U5(2,-8) U6(2.5,-8) U7(3,-8) U8(3.5,-8) U9(4,-8) U10(4.5,-8) U11(5,-8) U12(5.5,-8) U13(6,-8) U14(6.5,-8) U15(7,-8) U16(7.5,-8) U17(8,-8)
  silkscreen extent -0.5,-8.5 8.5,0.5, body extent -0.5,-8.5 8.5,0.5, height 1.3
CAPC0603N [mm] "Chip Capacitor, 2-Leads, Body 0.60x0.30mm, IPC Medium Density"
  rect 0.52x0.42 smd: 1(-0.31,0) 2(0.31,0)
  body extent -0.32,-0.17 0.32,0.17, height 0.3
capc1005n [mm] "Chip Capacitor, Body 1.0x0.5mm, IPC Medium Density"
  rect 0.8x0.6 smd: 1(-0.6,0) 2(0.6,0)
  silkscreen extent -1.3,-0.2 -1.3,0.2, body extent -0.55,-0.3 0.55,0.3, height 0.6
CAPC1005N [mm] "Chip Capacitor, Body 1.0x0.5mm, IPC Medium Density"
  rect 0.8x0.6 smd: 1(-0.6,0) 2(0.6,0)
  silkscreen extent -1.3,-0.2 -1.3,0.2, body extent -0.55,-0.3 0.55,0.3, height 0.6
CAPC1608N [mm] "Chip Capacitor, Body 1.6x0.8mm, IPC Medium Density"
  rect 1x1 smd: 1(-0.8,0) 2(0.8,0)
  silkscreen extent -1.6,-0.4 -1.6,0.4, body extent -0.87,-0.48 0.87,0.48, height 0.55
capc2012n [mm] "Chip Capacitor, Body 2.0x1.3mm, IPC Medium Density"
  rect 1.3x1.5 smd: 1(-0.85,0) 2(0.85,0)
  silkscreen extent -1.8,-0.65 -1.8,0.65, body extent -1.1,-0.72 1.1,0.72, height 1.1
cnc14 [mm]
  rect 1.2x4.75 smd: 1(0,0) 2(0,5.75) 3(2.54,0) 4(2.54,5.75) 5(5.08,0) 6(5.08,5.75) 7(7.62,0) 8(7.62,5.75) 9(10.16,0) 10(10.16,5.75) 11(12.7,0) 12(12.7,5.75) 13(15.24,0) 14(15.24,5.75)
  silkscreen extent -5.1,-3.88 20.3,8.2, body extent -5.08,-2.54 20.32,8.2, height 10
LED_RED [mm] "LTST-C194KRKT"
  rect 0.8x0.8 smd: 1(0,0) 2(1.5,0)
  body extent -0.1,-0.45 1.6,0.45, height 0.6
resc0603 [mm]
  rect 0.35x0.4 smd: 1(0,0) 2(0.65,0)
  body extent 0,-0.15 0.65,0.15, height 0.5
RESC0603 [mm]
  rect 0.35x0.4 smd: 1(0,0) 2(0.65,0)
  body extent 0,-0.15 0.65,0.15, height 0.5
resc1005n [mm] "Chip Resistor, Body 1.1x0.5mm, IPC Medium Density"
  rect 0.8x0.7 smd: 1(-0.6,0) 2(0.6,0)
  body extent -0.55,-0.3 0.55,0.3, height 0.4
SAMTEC_QSE-020-01-XXX-D [mm]
  rect 0.41x2.27 smd: 01(-7.6,-2.865) 02(-7.6,2.865) 03(-6.8,-2.865) 04(-6.8,2.865) 05(-6,-2.865) 06(-6,2.865) 07(-5.2,-2.865) 08(-5.2,2.865) 09(-4.4,-2.865) 10(-4.4,2.865) 11(-3.6,-2.865) 12(-3.6,2.865) 13(-2.8,-2.865) 14(-2.8,2.865) 15(-2,-2.865) 16(-2,2.865) 17(-1.2,-2.865) 18(-1.2,2.865) 19(-0.4,-2.865) 20(-0.4,2.865) 21(0.4,-2.865) 22(0.4,2.865) 23(1.2,-2.865) 24(1.2,2.865) 25(2,-2.865) 26(2,2.865) 27(2.8,-2.865) 28(2.8,2.865) 29(3.6,-2.865) 30(3.6,2.865) 31(4.4,-2.865) 32(4.4,2.865) 33(5.2,-2.865) 34(5.2,2.865) 35(6,-2.865) 36(6,2.865) 37(6.8,-2.865) 38(6.8,2.865) 39(7.6,-2.865) 40(7.6,2.865)
  rect 2.54x0.43 smd: G1(-8.065,0) G4(8.065,0)
  rect 4.7x0.43 smd: G2(-3.175,0) G3(3.175,0)
  silkscreen extent -10.64,-4.75 10.64,3.62
SMA-5-1814832-1 [mm] "CONN SMA JACK STR 50 OHM PCB"
  round 1.9 hole 1.5: 1(0,0)
  round 2 hole 1.6: 2(-2.54,2.54) 3(-2.54,-2.54) 4(2.54,-2.54) 5(2.54,2.54)
SOT-23 [mm]
  rect 0.6x1.25 smd: 1(0,0) 2(1.9,0) 3(0.95,2)
  silkscreen extent 0,0 1.9,2, body extent 0,0.3 1.9,1.7, height 1.2
testpoint#1 [mil]
  round 40 smd paste-39.37: 1(0,0)
  silkscreen extent -39,-39 39,39
testpoint#2 [mil]
  round 40 smd paste-39.37: 1(0,27.56)
  silkscreen extent -39,-39 39,39
VTRX+ [mm]
  rect 0.2x1.12 smd: 1(0,0) 2(0,2.66) 3(0.4,0) 4(0.4,2.66) 5(0.8,0) 6(0.8,2.66) 7(1.2,0) 8(1.2,2.66) 9(1.6,0) 10(1.6,2.66) 11(2,0) 12(2,2.66) 13(2.4,0) 14(2.4,2.66) 15(2.8,0) 16(2.8,2.66) 17(3.2,0) 18(3.2,2.66) 19(3.6,0) 20(3.6,2.66) 21(4,0) 22(4,2.66) 23(4.4,0) 24(4.4,2.66) 25(4.8,0) 26(4.8,2.66) 27(5.2,0) 28(5.2,2.66) 29(5.6,0) 30(5.6,2.66) 31(6,0) 32(6,2.66) 33(6.4,0) 34(6.4,2.66) 35(6.8,0) 36(6.8,2.66) 37(7.2,0) 38(7.2,2.66) 39(7.6,0) 40(7.6,2.66)
  silkscreen extent -1.2,-2.6 8.8,17.4, body extent -1.2,-2.6 8.8,17.4, height 2
WDFNX208 [mm]
  rect 0.3x0.5 smd: 1(0,0) 2(0.5,0) 3(1,0) 4(1.5,0) 5(1.5,1.8) 6(1,1.8) 7(0.5,1.8) 8(0,1.8)
  rect 1.6x0.9 smd: 9(0.75,0.9)
  silkscreen extent -0.57,-0.07 1.73,1.35, body extent -0.25,-0.12 1.75,1.87, height 0.8

## Part data
 J1 J2 J3 J4 J5: "40 Position Connector Receptacle, Center Strip Contacts Surface Mount Gold", Package="MAPBGA-624 Samtec", Availability=Bad, MF=Samtec, MP=QSE-020-01-F-D, Price=None, SnapEDA_Link=https://www.snapeda.com/parts/QSE-020-01-F-D/Samtec/view-part/1737145/?ref=snap, Toby_UK-Purchase-URL=https://snapeda.com/shop?store=Toby+UK&id=1737145
C1 C2 C3 C4 C5 C6 C7 C8 C9 C10 C11 C12 C13 C14 C15 C16 C17 C18 C19 C20 C21 C22 C23 C24 C25 C26 C27 C28 C29 C30 C31 C32 C33 C34 C35 C36 C105 C106 C107 C108 C109 C111 C112 C113 C114 C115 C116 C117 C118 C119 C120 C121 C122 C123 C124 C125 C126 C127 C128 C129 C130 C131 C132 C133 C134 C135 C138 C139 C140 C141 C150 C151 C152 C153 C154 C155 C160 C162 C163 C164 C165 C166 C167 C168 C169 C201 C218 C219 C220 C221 C222 C223 C224 C225 C226 C227 C228 C229 C230 C231 C232 C233: library part C, "CERAMIC CAPACITOR"
D1 D2 D3 D4 D5 D6: library part LED_GREEN, "Typical RED, GREEN, YELLOW, AMBER GaAs LED", LatestRevisionDate=17-Jul-2002, LatestRevisionNote="Re-released for DXP Platform.", PackageDescription="SM LED; 2 Flat Leads", PackageReference=3.2X1.6X1.1, PackageVersion=Feb-2002, Published=8-Jun-2000, Publisher="Altium Limited"
IC1 IC4: "Low Power Gigabit Transceiver", Case=BGA289, Manufacturer=CERN, Bonding=No, Component Type=Standard, Device=LPGBT, LatestRevisionDate=26.10.2018, Manufacturer Part Number=LPGBT, Mounted=Yes, PackageDescription="BGA, 289-Leads, Body 9.00x9.00mmx1.28mm, Pitch 0.50mm", Part Description="Low Power Gigabit Transceiver", Part Number=LPGBT, Pin Count=289, Pinout Version=180226, SMD=Yes, Socket=No
IC2: library part VTRX+_DF40C-2.0-40DS-0.4V, "VTRX+ module with 2.5mm stack Height.", Parameter 1=VTRX+
IC3: library part "CERN_GBT-SCA_REV 6.2", "The Slow Control Adapter ASIC for the GBT System", Device=GBT-SCA
J6 J8: library part SMA-5-1814832-1, "SMA Connector, Pitch 5.08 mm, 1 Position, Height 9.5 mm, Tail Length 4 mm, -65 to 165 degC, RoHS, Bulk", Frequency Max=3GHz, Manufacturer="TE Connectivity", Package Description="SMA Connector, Pitch 5.08 mm, 1 Position, Height 9.5 mm, Tail Length 4 mm", Coaxial Cable Types=-, Coaxial Termination=Solder, Connector Body Style=StraightJack, Connector Mounting=PCBMount, Connector Type=SMACoaxial, Contact Material=BerylliumCopper, Contact Plating=GoldPlatedContacts, Datasheet URL=http://www.onlinecomponents.com/productFiles/mf-AMP/eng_cd_1814832_a.pdf, Datasheet Version="Rev. B1, 03/2011", Impedance=50ohm, Manufacturer URL=http://www.te.com/, Package Reference=5-1814832-1, Product Range=ZDCSeries, SVHC=NoSVHC(15-Jun-2015)
P2 P3 P11 P14 P15: library part "Header 7X2", "Header, 7-Pin, Dual row", LatestRevisionDate=17-Jul-2002, LatestRevisionNote="Re-released for DXP Platform.", Publisher="Altium Limited"
Q1 Q2 Q3 Q4 Q5: "MOSFET N-CH 20V 2.1A SOT-23-3", ComponentLink2Description=Datasheet, ComponentLink2URL=https://www.diodes.com/assets/Datasheets/ZXMN2B01F.pdf
R1 R3 R4 R5 R6 R7 R8 R9 R10 R11 R12 R13 R14 R15 R16 R17 R18 R19 R20 R21 R22 R23 R24 R25 R26 R27 R28 R101 R103 R104 R105 R106 R107 R109 R110 R111 R112 R113 R114 R115 R116 R117 R118 R119 R120 R122 R123 R124 R125 R126 R127 R128 R129 R130 R131 R133 R134 R135 R142 R146 R147 R148 R202 R204 R206 R208 R210 R233 R234 R235 R236 R237 R238 R239 R243 R244 R245 R246: library part R1, "FILM RESISTOR"
  R1 R3 R16 R18 R24 R142: Parameter 1=1K, Text Field2=5%
  R4 R5 R6 R7 R8 R9 R10 R11 R12 R13 R17 R19 R20 R21 R22 R23 R25 R26 R27 R28 R111 R112 R113 R114 R115 R116 R117 R118 R119 R120 R122 R123 R124 R125 R126 R127 R128 R129 R130 R131 R133 R134 R135 R243: Text Field2=1%
  R14 R15 R101 R103 R104 R107 R109 R110 R202 R204 R206 R208 R210 R233 R234 R235 R236 R237 R238 R239 R244 R245 R246: Parameter 1=3.9K, Text Field2=5%
  R105 R106: Parameter 1=3.9K, Text Field2=1%
  R146: Parameter 1=402K, Text Field2=1%
  R147: Parameter 1=1M, Text Field2=1%
  R148: Parameter 1=4.75K, Text Field2=1%
RT1 RT2: library part "Res Thermal", "Thermistor", Code_IPC=RESC2012, LatestRevisionDate=29-May-2009, LatestRevisionNote="IPC-7351 Footprint Added.", PackageDescription="Chip Resistor 0805 Case Size", PackageReference=6-0805, PackageVersion=Mar-2003, Published=24-Mar-1999, Publisher="Altium Limited"
TP1 TP2 TP3 TP4 TP5 TP6 TP7 TP8 TP9 TP10 TP15 TP16 TP17: library part TP, "TEST POINT 40MIL DIA."

## Free pads (board coordinates)
  round 0.4 hole 0.25 mask+0.051: 1(11.25,0) 1(13.955,-13.239) 1(13.955,-7.509) 1(14.755,-13.239) 1(14.755,-7.509) 1(15.545,-10.761) 1(15.555,-13.239) 1(16.345,-16.491) 1(16.355,-7.509) 1(17.145,-16.491) 1(17.155,-7.509) 1(17.945,-10.761) 1(17.955,-13.239) 1(18.745,-16.491) 1(18.755,-7.509) 1(19.545,-16.491) 1(19.555,-7.509) 1(20.345,-16.491) 1(20.345,-10.761) 1(21.145,-16.491) 1(21.155,-7.509) 1(21.955,-13.239) 1(21.955,-7.509) 1(22.745,-10.761) 1(22.755,-13.239) 1(23.555,-7.509) 1(23.555,-13.239) 1(24.355,-13.239) 1(24.355,-7.509) 1(25.145,-10.761) 1(25.155,-13.239) 1(25.7,3.6) 1(25.955,-13.239) 1(25.955,-7.509) 1(26.755,-13.239) 1(26.755,-7.509) 1(27.45,0.6) 1(27.45,1.8) 1(27.5,-3) 1(27.5,-1.8) 1(27.545,-10.761) 1(27.555,-13.239) 1(27.6,-1) 1(27.6,-0.35) 1(27.6,2.8) 1(28,-1.4) 1(28.355,-13.239) 1(28.355,-7.509) 1(28.4,-3.8) 1(28.4,-3) 1(28.4,-1.8) 1(28.5,-0.6) 1(28.5,0.6) 1(28.5,1.8) 1(28.5,3) 1(29.155,-13.239) 1(29.155,-7.509) 1(33.5,-9.9) 1(36.7,-9.9) 1(61.875,-5.875) 1(62.875,-5.875) 1(65.5,3.6) 1(66.8,-4.6) 1(68.325,1.382) 1(68.5,-1.7) 1(68.6,3) 1(68.9,6.9) 1(69.6,-1.8) 1(85.1,-2.45) 1(85.15,-0.85) 1(96.4,-3.2) 1(96.4,-4.8) 1(96.4,-4) 1(96.4,-2.4) 1(96.4,-1.6) 1(96.4,-0.8) 1(96.4,0.8) 1(96.4,1.6) 1(105.531,5.569) 1(114,6.5) 1(119.1,9.2) 1(119.1,6.4) 1(127.1,9.2) 1(127.1,6.3) v(69.1,2.5) v(70,-3.75)
  round 0.25 / inner round 0.35 / far side round 0.35 hole 0.15 mask+0.051: 1(51.35,2.9) 1(51.75,1.75) 1(51.75,-0.25) 1(52.25,-1.75) 1(52.25,-1.25) 1(52.25,-0.75) 1(52.25,0.25) 1(52.25,0.75) 1(52.25,1.25) 1(52.25,-0.25) 1(52.75,-1.75) 1(52.75,-0.75) 1(52.75,-3.25) 1(52.75,-1.25) 1(52.75,-0.25) 1(52.75,1.25) 1(52.75,2.25) 1(52.75,3.25) 1(53.25,0.25) 1(53.25,1.25) 1(53.25,-0.75) 1(53.25,-0.25) 1(53.25,0.75) 1(53.25,3.25) 1(53.25,-1.75) 1(53.25,-1.25) 1(53.25,2.25) 1(53.25,-3.25) 1(53.25,-2.75) 1(53.5,-4.4) 1(53.75,-3.75) 1(53.75,0.75) 1(53.75,1.25) 1(53.75,-2.75) 1(53.75,2.25) 1(53.75,2.75) 1(54.25,-3.25) 1(54.25,-2.75) 1(54.25,-0.25) 1(54.25,-1.75) 1(54.25,-0.75) 1(54.25,3.25) 1(54.25,0.25) 1(54.251,1.226) 1(54.275,2.25) 1(54.75,0.25) 1(54.75,0.75) 1(54.75,1.25) 1(54.75,-0.75) 1(54.75,-0.25) 1(54.775,2.25) 1(55.25,-3.25) 1(55.25,-2.75) 1(55.25,-0.75) 1(55.25,0.25) 1(55.25,0.75) 1(55.25,1.25) 1(55.25,-1.75) 1(55.25,-0.25) 1(55.25,-1.25) 1(55.75,2.75) 1(55.75,3.25) 1(55.75,-3.75) 1(55.75,-0.75) 1(55.75,0.25) 1(55.75,0.75) 1(55.75,1.25) 1(55.75,-0.25) 1(55.75,-4.25) 1(55.75,-2.75) 1(56.25,-0.25) 1(56.25,-1.75) 1(56.25,-1.25) 1(56.25,2.75) 1(56.25,-3.25) 1(56.25,-2.75) 1(56.5,-4.4) 1(56.75,2.75) 1(56.75,3.25) 1(56.75,-3.75) 1(56.75,0.75) 1(56.75,1.25) 1(56.75,-1.25) 1(57.25,0.75) 1(57.25,1.25) 1(57.25,-0.25) 1(57.25,-2.75) 1(57.25,-0.75) 1(57.25,2.75) 1(57.75,2.75) 1(57.75,3.25) 1(57.75,-3.25) 1(57.75,-2.75) 1(57.75,-0.25) 1(57.75,0.75) 1(57.75,1.25) 1(57.75,-1.75) 1(57.75,-1.25) 1(57.75,-0.75) 1(58.25,0.25) 1(58.25,0.75) 1(58.25,1.25) 1(58.25,-0.75) 1(58.25,-1.25) 1(58.25,-1.75) 1(58.25,-0.25) 1(58.25,2.75) 1(58.25,3.25) 1(58.75,-3.25) 1(58.75,-2.75) 1(58.75,-1.75) 1(58.75,2.75) 1(58.75,3.25) 1(58.75,3.75) 1(58.752,4.25) 1(59.248,-3.771) 1(59.248,3.238) 1(59.25,2.75) 1(59.25,-3.25) 1(59.25,-1.75) 1(59.25,-1.25) 1(59.25,-0.75) 1(59.25,-0.25) 1(59.25,0.25) 1(59.25,3.75) 1(59.25,4.25) 1(59.75,-3.75) 1(59.75,-3.25) 1(59.75,3.25) 1(59.75,4.25) 1(59.75,-4.25) 1(59.75,-1.75) 1(59.75,-0.25) 1(59.75,3.75) 1(60.25,-3.25) 1(60.25,4.25) 1(60.25,3.25) 1(70.6,0.5) 1(70.6,1) 1(70.75,-1.75) 1(70.75,-0.75) 1(70.75,-0.25) 1(70.75,1.75) 1(71.25,-3.75) 1(71.25,0.75) 1(71.25,-3.25) 1(71.25,-1.75) 1(71.25,-0.75) 1(71.25,-0.25) 1(71.25,1.25) 1(71.25,1.75) 1(71.75,-0.25) 1(71.75,-3.75) 1(71.75,-2.75) 1(71.75,1.25) 1(71.75,1.75) 1(71.75,-3.25) 1(71.75,-1.75) 1(71.75,-0.75) 1(72.25,-0.25) 1(72.25,-2.75) 1(72.25,-1.75) 1(72.25,-1.25) 1(72.25,-0.75) 1(72.25,0.75) 1(72.25,2.25) 1(72.75,-3.25) 1(72.75,2.25) 1(72.75,1.25) 1(72.75,1.75) 1(72.75,-3.75) 1(73.25,-4.25) 1(73.25,-0.25) 1(73.25,-3.75) 1(73.25,-0.75) 1(73.25,0.25) 1(73.25,0.75) 1(73.75,-0.75) 1(73.75,-0.25) 1(73.75,-3.25) 1(73.75,0.25) 1(73.75,0.75) 1(73.75,1.25) 1(73.75,-3.75) 1(74.25,-4.25) 1(74.25,-0.25) 1(74.25,1.25) 1(74.25,3.75) 1(74.25,4.25) 1(74.25,-0.75) 1(74.255,-3.755) 1(74.75,-0.25) 1(74.75,0.25) 1(74.75,0.75) 1(74.75,1.25) 1(74.75,3.75) 1(74.75,-2.25) 1(74.75,-0.75) 1(74.75,3.25) 1(75.25,-0.75) 1(75.25,0.75) 1(75.25,1.25) 1(75.25,4.25) 1(75.25,-1.25) 1(75.25,0.25) 1(75.25,3.75) 1(75.75,0.75) 1(75.75,1.25) 1(75.75,3.75) 1(75.75,-3.25) 1(75.75,-2.75) 1(75.75,-1.25) 1(75.75,-0.75) 1(75.75,3.25) 1(75.75,-3.75) 1(76.25,-4.25) 1(76.25,0.25) 1(76.25,0.75) 1(76.25,1.25) 1(76.25,4.25) 1(76.25,-3.75) 1(76.25,3.75) 1(76.75,0.25) 1(76.75,0.75) 1(76.75,1.25) 1(76.75,3.75) 1(76.75,-3.75) 1(76.75,-3.25) 1(76.75,-2.75) 1(76.75,-1.25) 1(76.75,-0.75) 1(76.75,-0.25) 1(76.75,3.25) 1(77.25,-4.25) 1(77.25,0.25) 1(77.25,0.75) 1(77.25,4.25) 1(77.25,-3.75) 1(77.25,-1.25) 1(77.25,-0.75) 1(77.25,-0.25) 1(77.25,1.25) 1(77.25,3.75) 1(77.75,3.75) 1(77.75,-2.75) 1(77.75,1.75) 1(77.75,3.25) 1(78.25,-2.25) 1(78.25,-1.75) 1(78.25,0.75) 1(78.25,1.25) 1(78.25,1.75) 1(78.25,-2.75) 1(78.75,-1.75) 1(78.75,-2.25) 1(78.75,-1.25) 1(78.75,0.25) 1(78.75,0.75) 1(78.75,1.25) 1(78.75,1.75) 1(78.75,-2.75) 1(79.25,-1.25) 1(79.25,0.25)
  round 0.48 hole 0.3 mask+0.051: 1(85.2,-1.6) 1(85.2,3.2) 1(86,2.4) 1(86,0.8) 1(86.8,0.8) 1(86.8,-4) 1(86.8,2.4) 1(87.6,-3.2) 1(87.6,-2.4) 1(87.6,-1.6) 1(87.6,-0.8) 1(87.6,0) 1(87.6,0.8) 1(87.6,3.2) 1(88.4,0.8) 1(88.4,1.6) 1(88.4,2.4) 1(88.4,-0.8) 1(88.4,0) 1(88.4,-2.4) 1(88.4,-1.6) 1(88.4,-4.8) 1(88.4,-4) 1(89.2,-4.8) 1(89.2,-4) 1(89.2,-3.2) 1(89.2,1.6) 1(89.2,2.4) 1(89.2,-5.6) 1(89.2,-2.4) 1(89.2,-1.6) 1(89.2,-0.8) 1(89.2,0) 1(89.2,0.8) 1(90,-4.8) 1(90,0) 1(90,0.8) 1(90,-4) 1(90,1.6) 1(90,2.4) 1(90,-5.6) 1(90.8,-2.4) 1(90.8,-5.6) 1(90.8,-4.8) 1(90.8,-4) 1(90.8,-3.2) 1(90.8,2.4) 1(90.8,-1.6) 1(90.8,-0.8) 1(91.6,-2.4) 1(91.6,-5.6) 1(91.6,-4.8) 1(91.6,-4) 1(91.6,-3.2) 1(91.6,-1.6) 1(91.6,1.6) 1(91.6,2.4) 1(91.6,0) 1(91.6,0.8) 1(92.4,0.8) 1(92.4,1.6) 1(92.4,2.4) 1(92.4,3.2) 1(92.4,-2.4) 1(92.4,-1.6) 1(92.4,-0.8) 1(92.4,0) 1(92.4,4.8) 1(93.2,-3.2) 1(93.2,-2.4) 1(93.2,-1.6) 1(93.2,0) 1(93.2,0.8) 1(93.2,1.6) 1(93.2,2.4) 1(93.2,3.2) 1(93.2,4.8) 1(94,-3.2) 1(94,0) 1(94,0.8) 1(94,1.6) 1(94,2.4) 1(94,3.2) 1(94,-1.6) 1(94,-0.8)
  round 4.5 hole 2.5: M(3.5,-24.75) M(3.5,24.75) M(39.6,-24.75) M(39.6,24.75) M(47.1,-24.75) M(47.1,24.75) M(83.2,-24.75) M(83.2,24.75) M(90.7,-24.75) M(90.7,24.75) M(126.8,-24.75) M(126.8,24.75)

## Via types
v1: diameter 0.4, hole 0.25, Top Layer to Bottom Layer, 85 vias